# Allegro board STEPPER EVAL BRD - PCB Board File - Rev 1.0.brd
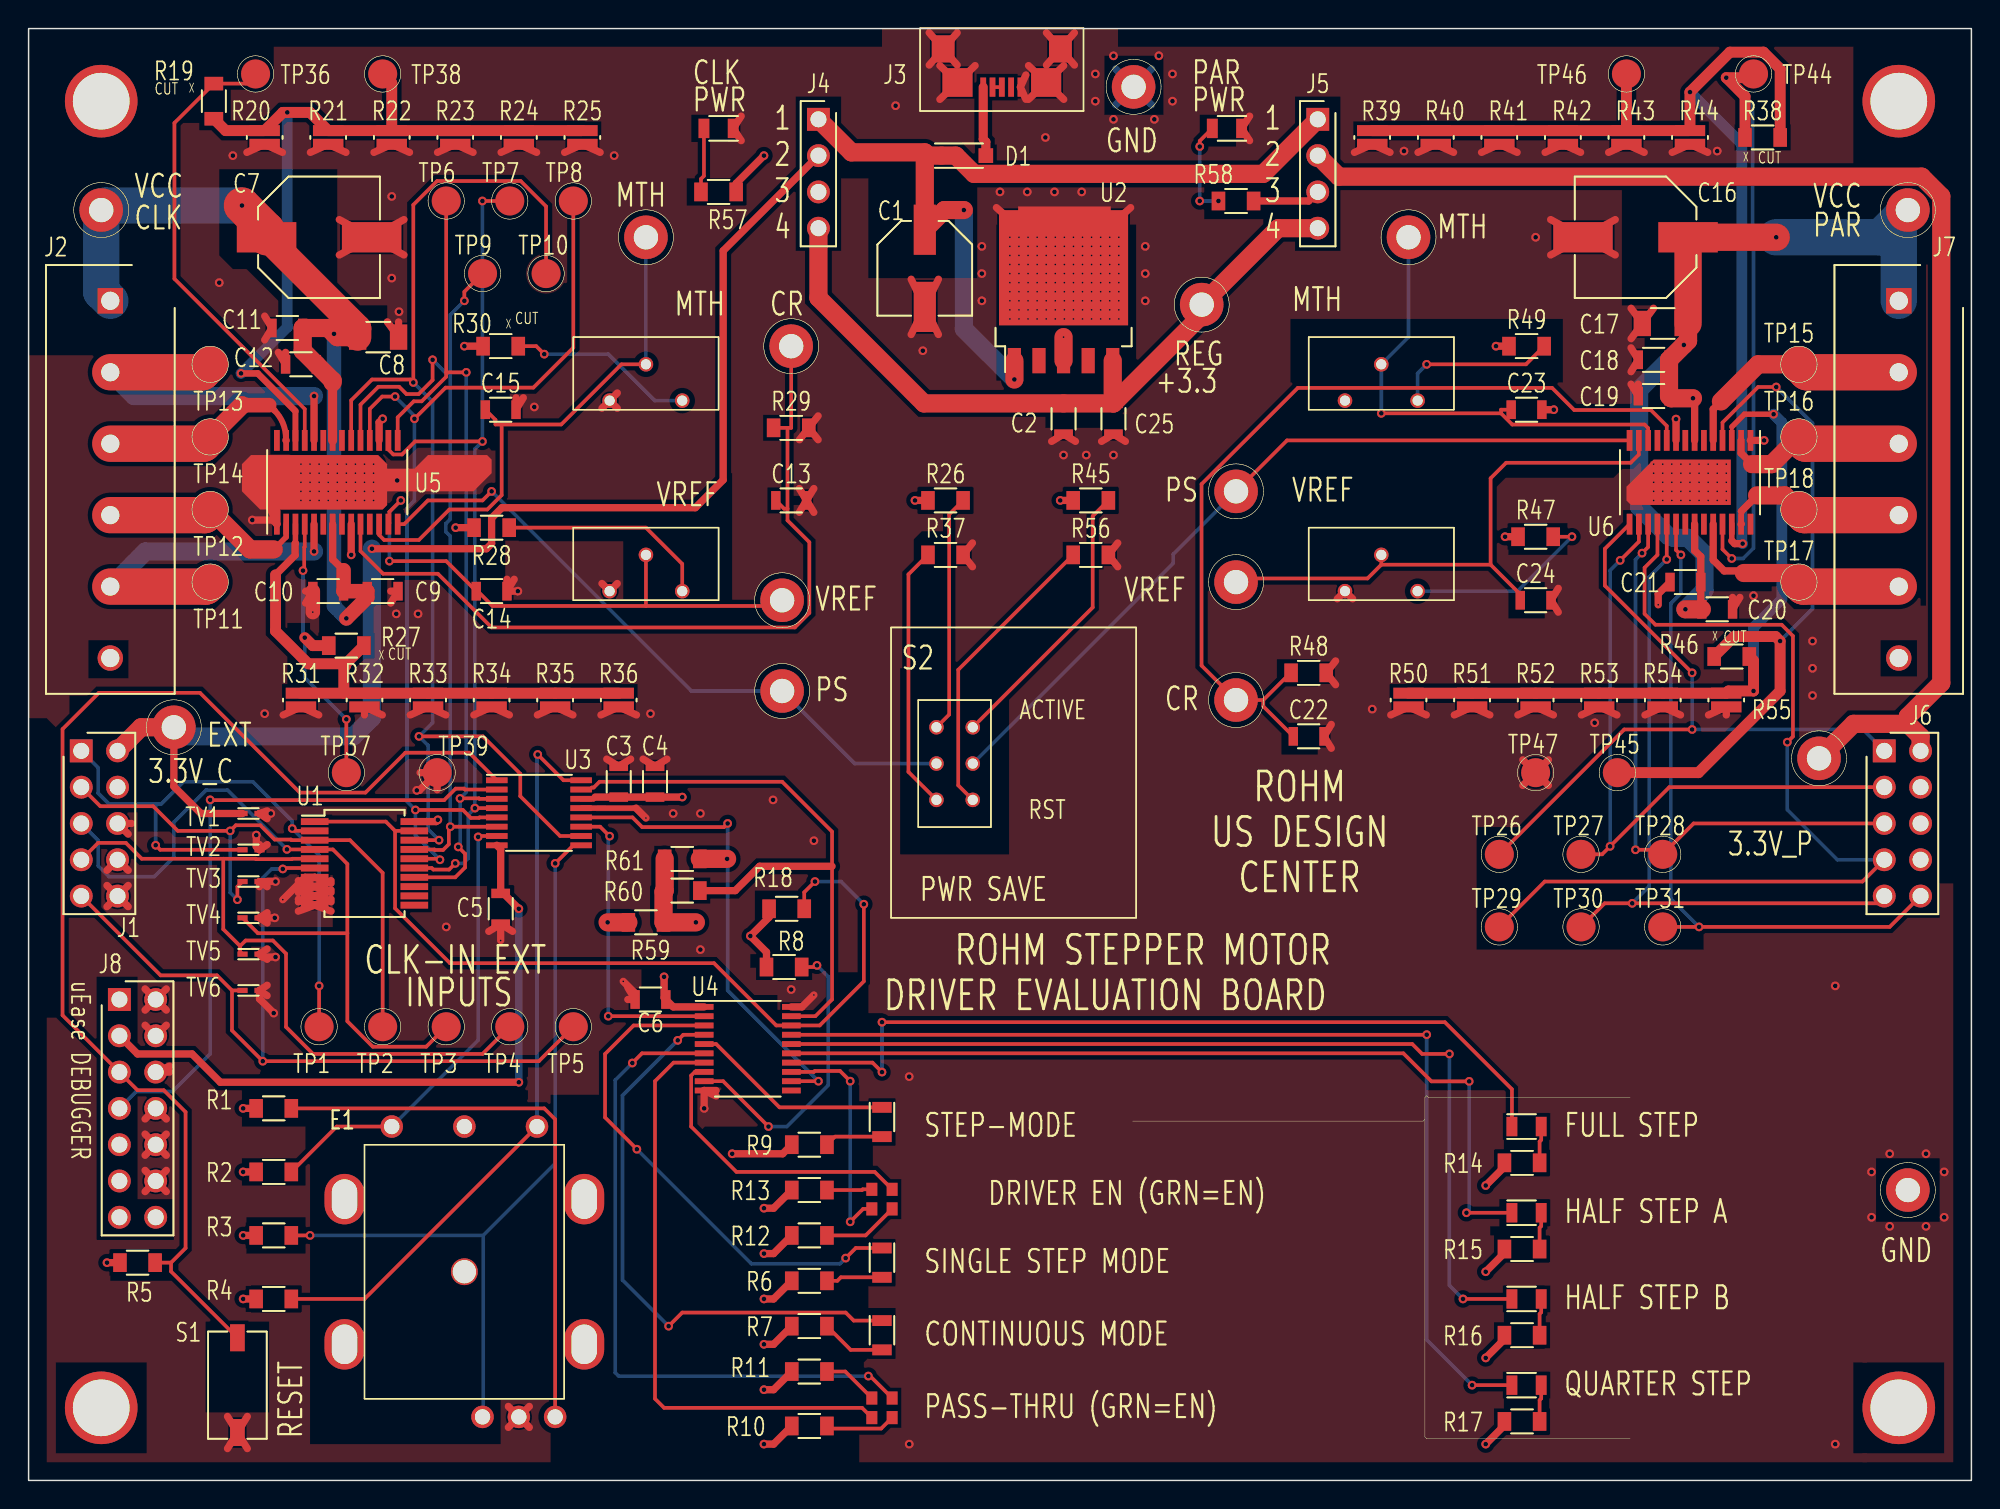
[diagram p0: board, top side]
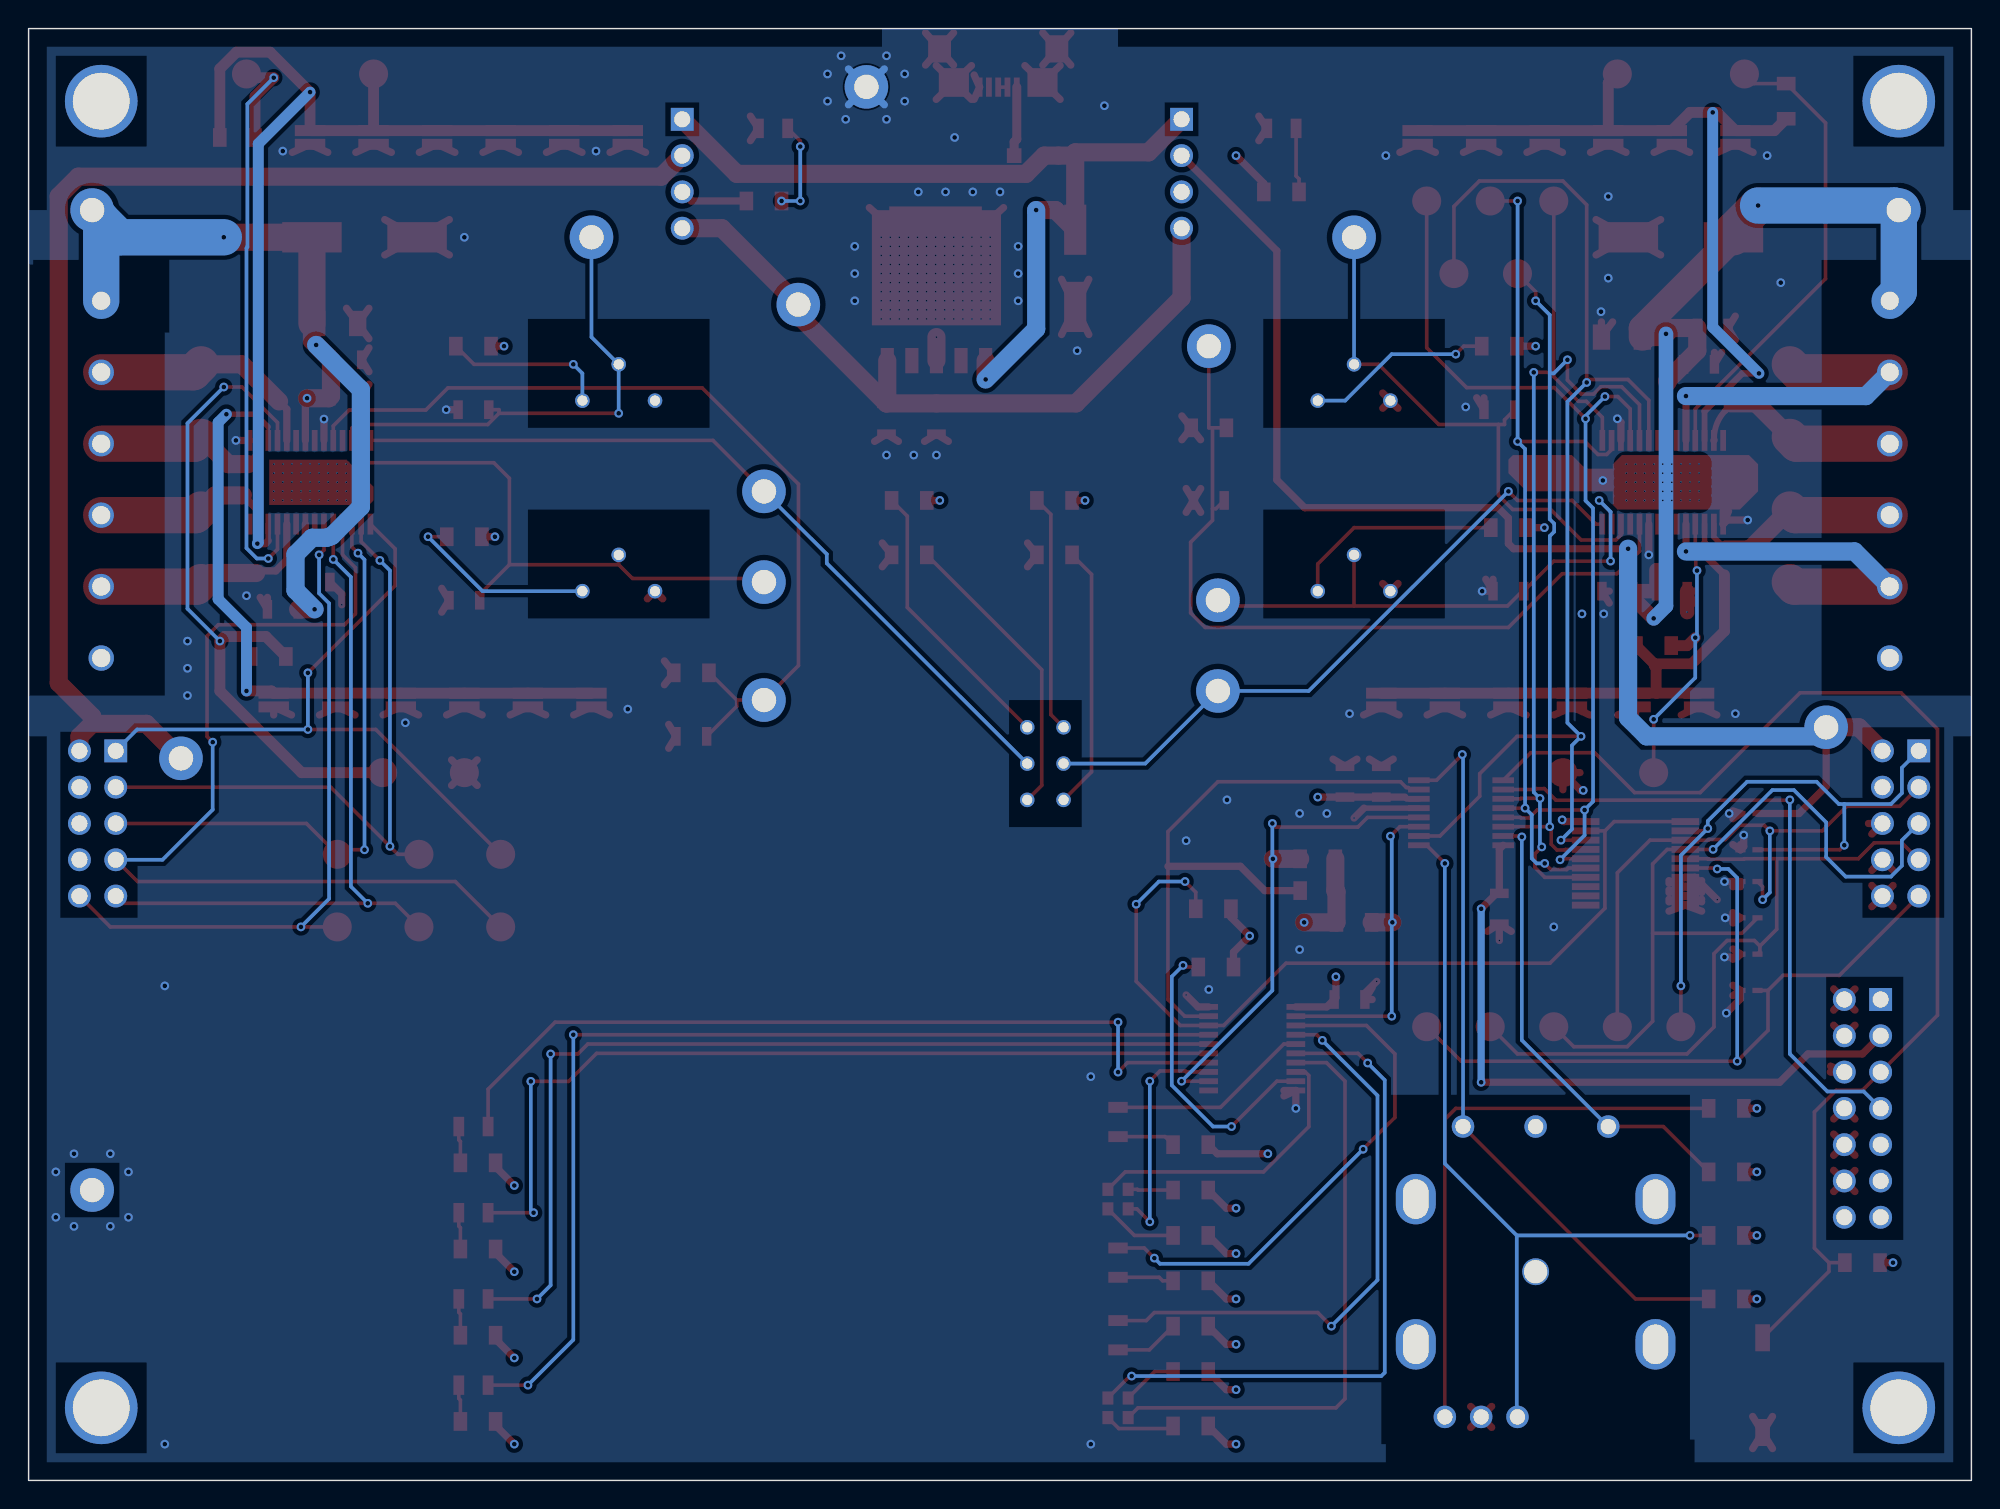
[diagram p1: board, bottom side, seen from below]

Outline 135.89 x 101.6 mm; copper layers: TOP, GND, PWR, BOTTOM. Coordinates in mm from the lower left corner of the outline.
Outline path: rectangle 0,0 135.89,101.6

## Design rules (mm)
nets with their own width: min track width 0.178; nets VPP
nets with their own width: min track width 0.254; nets OUT1A_C OUT1A_P OUT1B_C OUT1B_P OUT2A_C OUT2A_P OUT2B_C OUT2B_P REG_IN TST UE_RST VBUS VCC_C VCC_P
nets with their own width: min track width 0.508; nets +3.3V_C +3.3V_P EXT_+3.3V_C EXT_+3.3V_P GND_SIGNAL REG_+3.3V

## Placement (name value [footprint] x y rotation side)
C1  33uF, 50V  [CAPAE660X773N]  62.69 84.82 0 top
C2  0.1  [CAPC2012X145N]  72.39 74.3 90 top
C3  0.01  [CAPC2012X145N]  41.27 48.9 270 top
C4  4.7  [CAPC2012X145N]  43.81 48.9 270 top
C5  0.1  [CAPC2012X145N]  33.02 40.01 90 top
C6  0.01  [CAPC2012X145N]  43.5 33.66 0 top
C7  100uF, 50V  [CAPAE830X1050N]  20.32 87 90 top
C8  1.0  [CAPC3216X175N]  24.45 80.01 0 top
C9  0.1  [CAPC2012X145N]  24.77 62.23 0 top
C10  0.001  [CAPC2012X145N]  20.95 62.23 180 top
C11  0.1  [CAPC2012X145N]  18.1 80.64 180 top
C12  0.001  [CAPC2012X145N]  19.05 78.11 180 top
C13  0.001  [CAPC2012X145N]  53.34 68.58 0 top
C14  0.1  [CAPC2012X145N]  32.38 62.23 0 top
C15  0.1  [CAPC2012X145N]  33.02 74.93 0 top
C16  100uF, 50V  [CAPAE830X1050N]  112.39 87 270 top
C17  1.0  [CAPC3216X175N]  114.3 80.96 180 top
C18  0.1  [CAPC2012X145N]  113.67 78.42 180 top
C19  0.001  [CAPC2012X145N]  113.67 75.88 180 top
C20  0.1  [CAPC2012X145N]  118.11 60.96 0 top
C21  0.001  [CAPC2012X145N]  115.89 62.87 180 top
C22  0.001  [CAPC2012X145N]  89.53 52.07 0 top
C23  0.1  [CAPC2012X145N]  104.78 74.93 0 top
C24  0.1  [CAPC2012X145N]  105.41 61.59 0 top
C25  4.7  [CAPC2012X145N]  75.88 74.3 90 top
D1  20V 3A  [PMDU]  65.41 92.71 0 top
E1  62P22-L6  [62PENCODER]  30.48 14.61 0 top
J1  HDR 5X2  [HDR5X2]  3.68 51.05 270 top
J2  CLK-IN TERM BLOCK  [HDR6X1]  5.71 82.55 270 top
J3  Micro-B USB  [MICROUSBHIROSE]  68.07 100.18 180 top
J4  CLOCK-IN POWER SOURCE SELECTOR*  [HDR4X1]  55.24 95.25 270 top
J5  PARALLEL-IN POWER SOURCE SELECTOR*  [HDR4X1]  90.17 95.25 270 top
J6  HDR 5X2  [HDR5X2]  129.79 51.05 270 top
J7  PARALLEL TERM BLOCK  [HDR6X1]  130.81 82.55 270 top
J8  HDR 7X2  [HDR7X2]  6.35 33.66 270 top
LED1  LED  [DIOC2012X80N]  59.69 25.08 270 top
LED2  Bi-Color LED  [BILEDCC150X130X70N]  59.69 19.68 270 top
LED3  LED  [DIOC2012X80N]  59.69 15.24 270 top
LED4  LED  [DIOC2012X80N]  59.69 10.16 270 top
LED5  Bi-Color LED  [BILEDCC150X130X70N]  59.69 5.08 270 top
LED6  LED  [DIOC2012X80N]  104.78 24.77 0 top
LED7  LED  [DIOC2012X80N]  104.78 18.73 0 top
LED8  LED  [DIOC2012X80N]  104.78 12.7 0 top
LED9  LED  [DIOC2012X80N]  104.78 6.67 0 top
LED10  LED  [DIOC2012X80N]  48.26 94.61 180 top
LED11  LED  [DIOC2012X80N]  83.82 94.61 180 top
NOREF  -  [unnamed]  5.08 5.08 0 top
NOREF#2  -  [unnamed]  130.81 5.08 0 top
NOREF#3  -  [unnamed]  130.81 96.52 0 top
NOREF#4  -  [unnamed]  5.08 96.52 0 top
POT1  10K  [POTTHRUHOLE]  43.18 64.14 0 top
POT2  10K  [POTTHRUHOLE]  43.18 77.47 0 top
POT3  10K  [POTTHRUHOLE]  94.61 64.14 0 top
POT4  10K  [POTTHRUHOLE]  94.61 77.47 0 top
R1  91  [RESC2612X65N]  17.14 26.04 0 top
R2  10K  [RESC2612X65N]  17.14 21.59 0 top
R3  10K  [RESC2612X65N]  17.14 17.14 0 top
R4  10K  [RESC2612X65N]  17.14 12.7 0 top
R5  10K  [RESC2612X65N]  7.62 15.24 0 top
R6  1K  [RESC2612X65N]  54.61 13.97 180 top
R7  1K  [RESC2612X65N]  54.61 10.79 180 top
R8  10k  [RESC2612X65N]  52.84 35.93 0 top
R9  1K  [RESC2612X65N]  54.61 23.5 180 top
R10  1K  [RESC2612X65N]  54.61 3.81 180 top
R11  1K  [RESC2612X65N]  54.61 7.62 180 top
R12  1K  [RESC2612X65N]  54.61 17.14 180 top
R13  1K  [RESC2612X65N]  54.61 20.32 180 top
R14  1K  [RESC2612X65N]  104.46 22.23 180 top
R15  1K  [RESC2612X65N]  104.46 16.19 180 top
R16  1K  [RESC2612X65N]  104.46 10.16 180 top
R17  1K  [RESC2612X65N]  104.46 4.13 180 top
R18  10K  [RESC2612X65N]  53.02 40.01 0 top
R19  0  [RESC2612X65N]  12.95 96.52 270 top
R20  1.2  [RESC1220X65N]  16.51 93.98 0 top
R21  1.2  [RESC1220X65N]  20.95 93.98 0 top
R22  1.2  [RESC1220X65N]  25.4 93.98 0 top
R23  1.2  [RESC1220X65N]  29.84 93.98 0 top
R24  1.2  [RESC1220X65N]  34.29 93.98 0 top
R25  1.2  [RESC1220X65N]  38.73 93.98 0 top
R26  4.7K  [RESC2612X65N]  64.14 68.58 0 top
R27  0  [RESC2612X65N]  22.23 58.42 0 top
R28  1K  [RESC2612X65N]  32.38 66.67 0 top
R29  39K  [RESC2612X65N]  53.34 73.66 0 top
R30  3.48K  [RESC2612X65N]  33.02 79.38 0 top
R31  1.2  [RESC1220X65N]  19.05 54.61 0 top
R32  1.2  [RESC1220X65N]  23.5 54.61 0 top
R33  1.2  [RESC1220X65N]  27.94 54.61 0 top
R34  1.2  [RESC1220X65N]  32.38 54.61 0 top
R35  1.2  [RESC1220X65N]  36.83 54.61 0 top
R36  1.2  [RESC1220X65N]  41.27 54.61 0 top
R37  4.7K  [RESC2612X65N]  64.14 64.77 0 top
R38  0  [RESC2612X65N]  121.28 93.98 0 top
R39  1.2  [RESC1220X65N]  93.98 93.98 0 top
R40  1.2  [RESC1220X65N]  98.42 93.98 0 top
R41  1.2  [RESC1220X65N]  102.87 93.98 0 top
R42  1.2  [RESC1220X65N]  107.31 93.98 0 top
R43  1.2  [RESC1220X65N]  111.76 93.98 0 top
R44  1.2  [RESC1220X65N]  116.2 93.98 0 top
R45  4.7K  [RESC2612X65N]  74.3 68.58 0 top
R46  0  [RESC2612X65N]  119.13 57.66 0 top
R47  1K  [RESC2612X65N]  105.41 66.04 0 top
R48  39K  [RESC2612X65N]  89.53 56.52 0 top
R49  3.48K  [RESC2612X65N]  104.78 79.38 0 top
R50  1.2  [RESC1220X65N]  96.52 54.61 0 top
R51  1.2  [RESC1220X65N]  100.97 54.61 0 top
R52  1.2  [RESC1220X65N]  105.41 54.61 0 top
R53  1.2  [RESC1220X65N]  109.86 54.61 0 top
R54  1.2  [RESC1220X65N]  114.3 54.61 0 top
R55  1.2  [RESC1220X65N]  118.75 54.61 0 top
R56  4.7K  [RESC2612X65N]  74.3 64.77 0 top
R57  1K  [RESC2612X65N]  48.26 90.17 180 top
R58  1K  [RESC2612X65N]  84.45 89.53 180 top
R59  10K  [RESC2612X65N]  43.18 39.05 180 top
R60  10K  [RESC2612X65N]  45.72 41.27 0 top
R61  10K  [RESC2612X65N]  45.72 43.5 0 top
S1  Momentary Push-Button  [SWM7340X270N]  14.61 6.67 90 top
S2  DPDT  [SWTHRUHOLE]  64.77 50.16 270 top
TP1  Test Point R  [TPSMD80]  20.32 31.75 0 top
TP2  Test Point R  [TPSMD80]  24.77 31.75 0 top
TP3  Test Point R  [TPSMD80]  29.21 31.75 0 top
TP4  Test Point R  [TPSMD80]  33.66 31.75 0 top
TP5  Test Point R  [TPSMD80]  38.1 31.75 0 top
TP6  Test Point R  [TPSMD80]  29.21 89.53 0 top
TP7  Test Point R  [TPSMD80]  33.66 89.53 0 top
TP8  Test Point R  [TPSMD80]  38.1 89.53 0 top
TP9  Test Point R  [TPSMD80]  31.75 84.45 0 top
TP10  Test Point R  [TPSMD80]  36.2 84.45 0 top
TP11  Test Point R  [TPSMD80]  12.7 62.87 0 top
TP12  Test Point R  [TPSMD80]  12.7 67.94 0 top
TP13  Test Point R  [TPSMD80]  12.7 78.11 0 top
TP14  Test Point R  [TPSMD80]  12.7 73.03 0 top
TP15  Test Point R  [TPSMD80]  123.83 78.11 0 top
TP16  Test Point R  [TPSMD80]  123.83 73.03 0 top
TP17  Test Point R  [TPSMD80]  123.83 62.87 0 top
TP18  Test Point R  [TPSMD80]  123.83 67.94 0 top
TP19  Test Point R  [TPTH120X67]  82.05 82.28 0 top
TP20  Test Point R  [TPTH120X67]  10.16 52.7 0 top
TP21  Test Point R  [TPTH120X67]  125.23 50.53 0 top
TP22  Test Point R  [TPTH120X67]  5.08 88.9 0 top
TP23  Test Point R  [TPTH120X67]  131.44 88.9 0 top
TP24  Test Point R  [TPTH120X67]  77.29 97.52 0 top
TP25  Test Point R  [TPTH120X67]  131.44 20.32 0 top
TP26  Test Point R  [TPSMD80]  102.87 43.81 0 top
TP27  Test Point R  [TPSMD80]  108.58 43.81 0 top
TP28  Test Point R  [TPSMD80]  114.3 43.81 0 top
TP29  Test Point R  [TPSMD80]  102.87 38.73 0 top
TP30  Test Point R  [TPSMD80]  108.58 38.73 0 top
TP31  Test Point R  [TPSMD80]  114.3 38.73 0 top
TP32  Test Point R  [TPTH120X67]  52.7 55.24 0 top
TP33  Test Point R  [TPTH120X67]  52.7 61.59 0 top
TP34  Test Point R  [TPTH120X67]  53.34 79.38 0 top
TP35  Test Point R  [TPTH120X67]  43.18 87 0 top
TP36  Test Point R  [TPSMD80]  15.88 98.42 0 top
TP37  Test Point R  [TPSMD80]  22.23 49.53 0 top
TP38  Test Point R  [TPSMD80]  24.77 98.42 0 top
TP39  Test Point R  [TPSMD80]  28.57 49.53 0 top
TP40  Test Point R  [TPTH120X67]  84.45 69.22 0 top
TP41  Test Point R  [TPTH120X67]  84.45 62.87 0 top
TP42  Test Point R  [TPTH120X67]  84.45 54.61 0 top
TP43  Test Point R  [TPTH120X67]  96.52 87 0 top
TP44  Test Point R  [TPSMD80]  120.65 98.42 0 top
TP45  Test Point R  [TPSMD80]  111.12 49.53 0 top
TP46  Test Point R  [TPSMD80]  111.76 98.42 0 top
TP47  Test Point R  [TPSMD80]  105.41 49.53 0 top
TV1  5.78V 100mW  [ESDFL1406X55N]  15.56 46.67 0 top
TV2  5.78V 100mW  [ESDFL1406X55N]  15.56 44.13 0 top
TV3  5.78V 100mW  [ESDFL1406X55N]  15.56 41.91 0 top
TV4  5.78V 100mW  [ESDFL1406X55N]  15.56 39.37 0 top
TV5  5.78V 100mW  [ESDFL1406X55N]  15.56 36.83 0 top
TV6  5.78V 100mW  [ESDFL1406X55N]  15.56 34.29 0 top
U1  74LVC541A  [SOP65P780X200-20N]  23.5 43.18 270 top
U2  BD3570HFP  [TO172P1054X200-6N]  72.39 83.19 0 top
U3  ML610Q102  [SOP65P640X125-16N]  35.7 46.72 270 top
U4  BD8377FV-M  [SOP65P640X125-20N]  50.3 30.21 270 top
U5  BD63877EFV  [SOP65P640X100-29N]  21.59 69.85 0 top
U6  BD63876EFV  [SOP65P640X100-29N]  116.2 69.85 180 top

## Library data of the parts
C1 = C-POL_0: room: Voltage Reg
C2 = C_2: room: Voltage Reg
C3-C5 C25 = C_2: room: Micro
C6 = C_2
C7 = C-POL_0: room: Clock-In
C8-C15 = C_2: room: Clock-In
C16 = C-POL_0: room: Parallel
C17-C24 = C_2: room: Parallel
D1 = DIODE SCHOTTKY 20V 3A 123-SOD_3: room: Voltage Reg
E1 = ROTARY_ENCODER_QUAD_OUTPUT_0: room: Micro
J1 = HDR 5x2_0.100": room: 2
J2 J7 = CONN_TERM_BLOCK_6X1_0: room: 4
J3 = CONN PCB 5_0: room: Voltage Reg
J4 J5 = 4-PIN Jumper_0: room: Voltage Reg
J6 = HDR 5x2_1.100": room: 3
J8 = HDR 7x2_0.100": room: Micro
LED1 LED3 LED4 LED6-LED11 = LED_1
LED2 LED5 = Bi-Color LED-2_0
POT1 POT2 = POT_10K_10%_0: room: Clock-In
POT3 POT4 = POT_10K_10%_0: room: Parallel
R1 = RES_91_5%_1/8W_1: room: Micro
R2-R5 = RES_10K_1%_1/8W_0805PKG: room: Micro
R6 R7 R9-R17 R57 R58 = RES_1K_1%_1/8W_0805PKG
R8 = RES 150 OHM 1/8W 1% 0805 SMD
R18 R59-R61 = RES_10K_1%_1/8W_0805PKG
R19 R27 = RES_0_1/10W_0603PKG: room: Clock-In
R20-R25 R31-R36 = RES_1.2_1%_1/2W_0805WIDE_PKG: room: Clock-In
R26 R37 = RES 4.7K OHM 1/10W 1% 0805 SMD: room: Clock-In
R28 = RES_11.5K_5%_1/8W_0805PKG: room: Clock-In
R29 = RES_39K_1%_1/8W_0805PKG: room: Clock-In
R30 = RES_3.48K_1%_1/8W_0805PKG: room: Clock-In
R38 R46 = RES_0_1/10W_0603PKG: room: Parallel
R39-R44 R50-R55 = RES_1.2_1%_1/2W_0805WIDE_PKG: room: Parallel
R45 R56 = RES 4.7K OHM 1/10W 1% 0805 SMD: room: Parallel
R47 = RES_11.5K_5%_1/8W_0805PKG: room: Parallel
R48 = RES_39K_1%_1/8W_0805PKG: room: Parallel
R49 = RES_3.48K_1%_1/8W_0805PKG: room: Parallel
S1 = SW PUSHBUTTON_0: room: Micro
S2 = DPDT Switch-6-pin_0: room: joint
TP1-TP5 = Test Point R: room: 2
TP6-TP10 = Test Point R
TP11-TP18 = Test Point R: room: 4
TP19-TP25 = Test Point R: room: 5
TP26-TP31 = Test Point R: room: 3
TP32-TP39 = Test Point R: room: Clock-In
TP40-TP47 = Test Point R: room: Parallel
TV1-TV6 = DIODE ESD 5V 100mW BiDir VMN2_3: room: 2
U1 = SN74LVC541A_5: room: 2
U2 = BD3570HFP_2: room: Voltage Reg
U3 = ML610Q102: room: Micro
U4 = BD8377FV-M_2
U5 = BD63877EFV_5: room: Clock-In
U6 = BD63876EFV_2: room: Parallel

## Footprints (pads in the part's own frame, mm; a bottom-side part is the same pattern mirrored in y, then rotated)
62PENCODER
  round 1.88 hole 1.626 unplated: (0,0)
  round 1.575 hole 1.067: 1(6.35,-10.16) 2(3.81,-10.16) 3(1.27,-10.16) 4(5.08,10.16) 5(0,10.16) 6(-5.08,10.16)
  oval 2.794x3.531 hole 1.778x2.769: 8(8.382,5.08) 9(8.382,-5.08) 10(-8.382,-5.08) 11(-8.382,5.08)
BILEDCC150X130X70N
  rect 0.92x0.77 smd: 1(-0.685,-0.71) 2(0.685,-0.71) 3(0.685,0.71) 4(-0.685,0.71)
CAPAE660X773N
  rect 1.55x3.51 smd: 1(0,2.7) 2(0,-2.7)
CAPAE830X1050N
  rect 2.12x4.16 smd: 1(0,3.675) 2(0,-3.675)
CAPC2012X145N
  rect 0.66x1.31 smd: 1(-1.075,0) 2(1.075,0)
CAPC3216X175N
  rect 1.21x1.77 smd: 1(-1.43,0) 2(1.43,0)
DIOC2012X80N
  rect 0.76x1.36 smd: A(1.025,0) C(-1.025,0)
ESDFL1406X55N
  rect 0.71x0.37 smd: A(0.595,0) C(-0.595,0)
HDR4X1
  rect 1.6x1.6 hole 1.118: 1(0,0)
  round 1.6 hole 1.118: 2(2.54,0) 3(5.08,0) 4(7.62,0)
HDR5X2
  rect 1.6x1.6 hole 1.118: 1(0,0)
  round 1.6 hole 1.118: 2(0,2.54) 3(2.54,0) 4(2.54,2.54) 5(5.08,0) 6(5.08,2.54) 7(7.62,0) 8(7.62,2.54) 9(10.16,0) 10(10.16,2.54)
HDR6X1
  rect 1.778x1.778 hole 1.27: 1(0,0)
  round 1.778 hole 1.27: 2(5,0) 3(10,0) 4(15,0) 5(20,0) 6(25,0)
HDR7X2
  rect 1.6x1.6 hole 1.118: 1(0,0)
  round 1.6 hole 1.118: 2(0,2.54) 3(2.54,0) 4(2.54,2.54) 5(5.08,0) 6(5.08,2.54) 7(7.62,0) 8(7.62,2.54) 9(10.16,0) 10(10.16,2.54) 11(12.7,0) 12(12.7,2.54) 13(15.24,0) 14(15.24,2.54)
MICROUSBHIROSE
  rect 0.406x1.346 smd: 1(1.3,2.675) 2(0.65,2.675) 3(0,2.675) 4(-0.65,2.675) 5(-1.3,2.675)
  rect 2.108x2.007 smd: 6(-3.1,2.35) 7(3.1,2.35)
  rect 1.6x1.905 smd: 8(-4.1,0) 9(4.1,0)
PMDU
  rect 1.02x1.03 smd: A(1.55,0) C(-1.55,0)
POTTHRUHOLE
  round 1.016 hole 0.711: 1(2.54,-1.905) 2(0,0.635) 3(-2.54,-1.905)
RESC1220X65N
  rect 2.13x0.77 smd: 1(0,0.48) 2(0,-0.48)
RESC2612X65N
  rect 0.95x1.31 smd: 1(-1.23,0) 2(1.23,0)
SOP65P640X100-29N
  rect 0.4x1.46 smd: 1(-4.225,-2.93) 2(-3.575,-2.93) 3(-2.925,-2.93) 4(-2.275,-2.93) 5(-1.625,-2.93) 6(-0.975,-2.93) 7(-0.325,-2.93) 8(0.325,-2.93) 9(0.975,-2.93) 10(1.625,-2.93) 11(2.275,-2.93) 12(2.925,-2.93) 13(3.575,-2.93) 14(4.225,-2.93) 15(4.225,2.93) 16(3.575,2.93) 17(2.925,2.93) 18(2.275,2.93) 19(1.625,2.93) 20(0.975,2.93) 21(0.325,2.93) 22(-0.325,2.93) 23(-0.975,2.93) 24(-1.625,2.93) 25(-2.275,2.93) 26(-2.925,2.93) 27(-3.575,2.93) 28(-4.225,2.93)
  rect 5.5x2.9 smd: 29(0,0)
SOP65P640X125-16N
  rect 0.41x1.51 smd: 1(-2.275,-2.95) 2(-1.625,-2.95) 3(-0.975,-2.95) 4(-0.325,-2.95) 5(0.325,-2.95) 6(0.975,-2.95) 7(1.625,-2.95) 8(2.275,-2.95) 9(2.275,2.95) 10(1.625,2.95) 11(0.975,2.95) 12(0.325,2.95) 13(-0.325,2.95) 14(-0.975,2.95) 15(-1.625,2.95) 16(-2.275,2.95)
SOP65P640X125-20N
  rect 0.41x1.31 smd: 1(-2.925,-3.05) 2(-2.275,-3.05) 3(-1.625,-3.05) 4(-0.975,-3.05) 5(-0.325,-3.05) 6(0.325,-3.05) 7(0.975,-3.05) 8(1.625,-3.05) 9(2.275,-3.05) 10(2.925,-3.05) 11(2.925,3.05) 12(2.275,3.05) 13(1.625,3.05) 14(0.975,3.05) 15(0.325,3.05) 16(-0.325,3.05) 17(-0.975,3.05) 18(-1.625,3.05) 19(-2.275,3.05) 20(-2.925,3.05)
SOP65P780X200-20N
  rect 0.48x1.93 smd: 1(-2.925,-3.485) 2(-2.275,-3.485) 3(-1.625,-3.485) 4(-0.975,-3.485) 5(-0.325,-3.485) 6(0.325,-3.485) 7(0.975,-3.485) 8(1.625,-3.485) 9(2.275,-3.485) 10(2.925,-3.485) 11(2.925,3.485) 12(2.275,3.485) 13(1.625,3.485) 14(0.975,3.485) 15(0.325,3.485) 16(-0.325,3.485) 17(-0.975,3.485) 18(-1.625,3.485) 19(-2.275,3.485) 20(-2.925,3.485)
SWM7340X270N
  rect 1.89x1.03 smd: 1(-3.315,0) 2(3.315,0)
SWTHRUHOLE
  round 1.016 hole 0.711: 1(-2.54,-1.27) 2(0,-1.27) 3(2.54,-1.27) 4(2.54,1.27) 5(0,1.27) 6(-2.54,1.27)
TO172P1054X200-6N
  rect 0.92x1.77 smd: 1(-3.44,-4.822) 2(-1.72,-4.822) 3(0,-4.822) 4(1.72,-4.822) 5(3.44,-4.822)
  rect 9.03x8.06 smd: 6(0,1.677)
TPSMD80
  round 2.032 smd: 1(0,0)
TPTH120X67
  round 3.048 hole 1.702: 1(0,0)
unnamed
  round 5.08 hole 3.962 unplated: (0,0)

## Nets
+3.3V_C: C3.2 C4.2 C6.2 J4.3 R1.1 R2.1 R3.1 R4.1 R5.1 R6.2 R7.2 R8.1 R9.2 R10.2 R11.2 R12.2 R13.2 R14.2 R15.2 R16.2 R17.2 R18.1 R26.1 R28.1 R30.1 R57.1 R59.1 R60.1 R61.1 U1.20(VCC) U3.14(VDD) U4.1(VCC)
+3.3V_P: J5.3 R45.1 R47.1 R49.1 R58.1
GND_SIGNAL: C1.2 C2.1 C3.1 C4.1 C5.1 C6.1 C7.2 C8.2 C9.2 C10.2 C11.2 C12.2 C13.2 C14.2 C15.2 C16.2 C17.2 C18.2 C19.2 C20.2 C21.2 C22.2 C23.2 C24.2 C25.1 E1.2(GND) E1.5(SW A) J1.4(2) J1.6(3) J1.8(4) J1.10(5) J2.6 J3.5 J3.6 J3.7 J3.8 J3.9 J6.4(2) J6.6(3) J6.8(4) J7.6 J8.2(1) J8.4(2) J8.6(3) J8.8(4) J8.10(5) J8.12 LED10.C(CATHODE) LED11.C(CATHODE) POT1.3 POT2.3 POT3.3 POT4.3 R20.2 R21.2 R22.2 R23.2 R24.2 R25.2 R29.2 R31.2 R32.2 R33.2 R34.2 R35.2 R36.2 R37.2 R39.2 R40.2 R41.2 R42.2 R43.2 R44.2 R48.2 R50.2 R51.2 R52.2 R53.2 R54.2 R55.2 R56.2 S1.1 TP24.1(TP) TP25.1(TP) TP39.1(TP) TP47.1(TP) TV1.A(ANODE) TV2.A(ANODE) TV3.A(ANODE) TV4.A(ANODE) TV5.A(ANODE) TV6.A(ANODE) U1.7(A5) U1.8(A6) U1.9(A7) U1.10(GND) U2.3(GND) U2.6(FIN) U3.13(GND) U4.10(OEN_B) U4.20(GND) U5.1(GND#1) U5.9(GND#9) U5.17(TEST) U6.1(GND#1) U6.9(GND#9)
VBUS: D1.A(ANODE) J3.1
VCC_C: C7.1 C8.1 C9.1 C10.1 C11.1 C12.1 J2.1 TP22.1(TP) U5.7(VCC#7) U5.22(VCC#22)
VCC_P: C16.1 C17.1 C18.1 C19.1 C20.1 C21.1 J7.1 TP23.1(TP) U6.7(VCC#7) U6.22(VCC#22)
BUFFER_OE: R18.2 U1.1(O\E\1) U1.19(O\E\2) U4.18(D11)
CLK: TP6.1(TP) U1.14(Y4) U3.3(B0) U5.15(CLK)
CLK_E: J1.9(10) TP5.1(TP) TV6.C(CATHODE) U1.6(A4)
CW_CCW: TP7.1(TP) U1.15(Y3) U3.4(B1) U5.16(CW_CCW)
CW_CCW_E: J1.7(9) TP4.1(TP) TV5.C(CATHODE) U1.5(A3)
D+: J3.2 J3.3
ENABLE: TP10.1(TP) U1.18(Y0) U3.10(B4) U5.20(ENABLE)
ENABLE_E: J1.1(6) TP1.1(TP) TV2.C(CATHODE) U1.2(A0)
EXT_+3.3V_C: J1.2(1) J4.2 TP20.1(TP) TV1.C(CATHODE)
EXT_+3.3V_P: J5.2 J6.2(1) TP21.1(TP)
I01: J6.3(7) TP27.1(TP) U6.16(I01)
I02: J6.9(10) TP30.1(TP) U6.19(I02)
I11: J6.5(8) TP28.1(TP) U6.17(I11)
I12: J6.10(5) TP31.1(TP) U6.20(I12)
LED_CLK: R60.2 U3.15(B7) U4.19(CLK)
LED_LATCH: R61.2 U3.12(B6) U4.12(LATCH)
LED_SERIN: R59.2 U3.11(B5) U4.2(SERIN)
MODE_0: TP8.1(TP) U1.16(Y2) U3.5(B2) U5.18(MODE_0)
MODE_0_E: J1.5(8) TP3.1(TP) TV4.C(CATHODE) U1.4(A2)
MODE_1: TP9.1(TP) U1.17(Y1) U3.6(B3) U5.19(MODE_1)
MODE_1_E: J1.3(7) TP2.1(TP) TV3.C(CATHODE) U1.3(A1)
OUT1A_C: J2.5 TP11.1(TP) U5.5(OUT1A)
OUT1A_P: J7.2 TP15.1(TP) U6.5(OUT1A)
OUT1B_C: J2.4 TP12.1(TP) U5.2(OUT1B)
OUT1B_P: J7.3 TP16.1(TP) U6.2(OUT1B)
OUT2A_C: J2.2 TP13.1(TP) U5.24(OUT2A)
OUT2A_P: J7.5 TP17.1(TP) U6.24(OUT2A)
OUT2B_C: J2.3 TP14.1(TP) U5.27(OUT2B)
OUT2B_P: J7.4 TP18.1(TP) U6.27(OUT2B)
PHASE 1: J6.1(6) TP26.1(TP) U6.15(PHASE1)
PHASE 2: J6.7(9) TP29.1(TP) U6.18(PHASE2)
REG_+3.3V: C2.2 C25.2 J4.4 J5.4 TP19.1(TP) U2.5(VOUT)
REG_IN: C1.1 D1.C(CATHODE) J4.1 J5.1 U2.1(VIN)
TST: J8.7(9) U3.2(TEST)
UE_RST: J8.5(8) R5.2 S1.2 U3.1(RESET)
VPP: C5.2 J8.3(7) U3.8(VPP)
N04356: R38.2 R39.1 R40.1 R41.1 R42.1 R43.1 R44.1 TP46.1(TP) U6.26(RNF2)
N04438: R46.2 R50.1 R51.1 R52.1 R53.1 R54.1 R55.1 U6.3(RNF1)
N05207: R38.1 TP44.1(TP) U6.25(RNF2S)
N05211: R46.1 TP45.1(TP) U6.4(RNF1S)
N07764: C22.1 R48.1 TP42.1(TP) U6.10(CR)
N07926: C23.1 POT4.2 TP43.1(TP) U6.12(MTH)
N07967: C24.1 POT3.2 TP41.1(TP) U6.13(VREF)
N07979: S2.5(CENTER) TP40.1(TP) U6.14(PS)
N08045: R45.2 S2.6(ON)
N08052: R56.1 S2.4(OFF)
N13007: R19.2 R20.1 R21.1 R22.1 R23.1 R24.1 R25.1 TP38.1(TP) U5.26(RNF2)
N13055: R27.2 R31.1 R32.1 R33.1 R34.1 R35.1 R36.1 U5.3(RNF1)
N13235: R19.1 TP36.1(TP) U5.25(RNF2S)
N13239: R27.1 TP37.1(TP) U5.4(RNF1S)
N13369: E1.4(OUTPUT A) R4.2 U3.16(A0)
N13541: C13.1 R29.1 TP34.1(TP) U5.10(CR)
N13553: C15.1 POT2.2 TP35.1(TP) U5.12(MTH)
N13573: C14.1 POT1.2 TP33.1(TP) U5.13(VREF)
N13585: S2.2(CENTER) TP32.1(TP) U5.14(PS)
N13636: E1.3(OUTPUT B) R3.2 U3.9(A1)
N13645: R37.1 S2.3(OFF)
N18632: E1.6(SW B) R2.2 U3.7(A2)
N24750: LED3.A(ANODE) R6.1
N24893: LED4.A(ANODE) R7.1
N25089: LED1.A(ANODE) R9.1
N25117: LED5.3(ANODE-2) R10.1
N25418: LED6.A(ANODE) R14.1
N25588: LED7.A(ANODE) R15.1
N25650: LED3.C(CATHODE) U4.3(D0)
N25662: LED4.C(CATHODE) U4.4(D1)
N25674: LED1.C(CATHODE) U4.5(D2)
N25686: LED5.4(CATHODE-2) U4.6(D3)
N25698: LED5.2(CATHODE-1) U4.7(D4)
N25710: LED2.4(CATHODE-2) U4.8(D5)
N25722: LED2.2(CATHODE-1) U4.13(D6)
N25734: LED6.C(CATHODE) U4.14(D7)
N25746: LED7.C(CATHODE) U4.15(D8)
N25832: LED8.A(ANODE) R16.1
N25874: LED9.A(ANODE) R17.1
N25916: LED8.C(CATHODE) U4.16(D9)
N25920: LED9.C(CATHODE) U4.17(D10)
N39738: R26.2 S2.1(ON)
N64475: R8.2 U4.9(RST_B)
N72290: POT3.1 R47.2
N72302: POT4.1 R49.2
N72314: POT2.1 R30.2
N72342: POT1.1 R28.2
N81433: E1.1(5V) R1.2
N100226: LED2.3(ANODE-2) R12.1
N100233: LED2.1(ANODE-1) R13.1
N100254: LED5.1(ANODE-1) R11.1
N158063: LED10.A(ANODE) R57.2
N159401: LED11.A(ANODE) R58.2

Pads without a net: E1 8 9 10 11; J3 4; J8 1 9 11 13 14; U1 11 12 13; U2 2 4; U4 11; U5 6 8 11 21 23 28 29; U6 6 8 11 21 23 28 29

## Via types
v1: diameter 0.61, hole 0.33, TOP to BOTTOM, 211 vias
v2: diameter 0.127, hole 0.254, TOP to BOTTOM, 228 vias

## Routing (per net, layer and track width the routed paths; a pad name or vN(x,y) marks a point on that pad's centre or on a via; arc(x,y) is an arc through that point)
+3.3V_C: length 64.3
  TOP w0.381: 39.63,47.82 39.51,47.7 U3.14
  TOP w0.508: v1(51.44,15.88) 52.11,15.88 R12.2 ; v1(101.92,2.54) 103.23,3.85 R17.2 ; R10.2 52.11,2.54 v1(51.44,2.54) ; R28.1 v1(29.87,66.67) ; R16.2 103.23,9.88 v1(101.92,8.57) ; R15.2 103.23,15.91 v1(101.92,14.61) ; v1(45.72,47.82) C4.2 C3.2 39.63,47.82 ; v1(51.44,12.7) 52.11,12.7 R6.2 ; R11.2 52.11,6.35 v1(51.44,6.35) ; v1(28.63,46.23) 28.5,46.11 U1.20 ; R26.1 v1(62,68.58) ; R13.2 52.11,19.05 v1(51.44,19.05) ; R8.1 51.61,36.97 v1(50.48,38.1) 51.79,39.41 R18.1 ; U4.1 45.09,33.14 C6.2 44.45,33.78 v1(44.45,35.24) ; R7.2 52.11,9.53 v1(51.44,9.53) ; v1(49.21,22.86) 52.74,22.86 R9.2 ; R4.1 v1(15.01,12.7) ; R3.1 v1(15.01,17.14) ; R57.1 49.49,90.77 v1(51.44,92.71) ; v1(15.01,21.59) R2.1 ; R14.2 103.23,21.95 v1(101.92,20.64) ; v1(15.01,26.04) R1.1 ; R30.1 v1(30.48,79.38) ; R5.1 v1(5.48,15.24)
  TOP w1.27: v1(46.67,39.05) R59.1 44.41,41.2 R60.1 R61.1
+3.3V_P: length 7.5
  TOP w0.508: J5.3 89.53,89.53 R58.1 ; R47.1 v1(103.27,66.04) ; R45.1 v1(72.16,68.58) ; R49.1 v1(102.64,79.38)
GND_SIGNAL: length 308.3
  TOP w0.381: U3.13 42.49,47.05
  TOP w0.508: 97.76,53.57 R50.2 95.28,53.57 ; 114.96,92.94 R44.2 117.45,92.94 ; 33.56,3.71 E1.2 ; E1.2 33.56,5.18 ; E1.2 35.02,3.71 ; E1.2 35.02,5.18 ; 113,92.94 R43.2 110.52,92.94 ; 8.15,20.21 J8.12 ; J8.12 9.63,20.21 ; J8.12 9.63,21.7 ; J8.12 8.15,21.7 ; 28.57,48.34 TP39.1 ; TP39.1 27.33,48.29 v1(27.15,48.29) ; TP39.1 27.38,49.53 ; 19.37,61.4 C10.2 19.37,62.23 ; 71.56,72.71 C2.1 73.22,72.71 ; 13.91,4.48 S1.1 ; S1.1 15.3,2.23 ; S1.1 15.3,4.48 ; S1.1 13.91,2.23 ; 104.11,92.94 R41.2 101.63,92.94 ; 42.11,50.48 C3.1 40.44,50.48 ; TV6.A 16.69,33.93 ; TV6.A 16.69,34.65 ; TV6.A 16.15,33.69 v1(17.14,32.7) ; 106.99,62.43 C24.2 106.99,60.76 ; U1.8 21.15,41.14 ; U1.8 18.87,41.97 ; U1.8 21.15,41.97 ; U1.8 18.87,41.14 ; C1.2 63.64,84.06 ; C1.2 61.73,80.19 ; C1.2 61.73,84.06 ; C1.2 63.64,80.19 ; 42.49,47.05 v2(43.18,46.35) ; 91.54,61.69 92.08,62.23 92.61,61.69 ; 29.18,53.57 R33.2 26.7,53.57 ; C21.2 113.98,62.03 v2(113.98,61.28) ; 32.19,38.42 C5.1 ; C5.1 33.85,38.42 ; C5.1 v2(33.02,37.78) ; U1.10 21.15,40.67 ; U1.10 18.87,39.84 ; U1.10 18.87,40.67 ; U1.10 21.15,39.84 ; U1.9 21.15,41.32 ; U1.9 21.15,40.49 ; U1.9 18.87,40.49 ; U1.9 18.87,41.32 ; TP47.1 106.31,48.63 ; TP47.1 104.51,50.43 ; TP47.1 104.51,48.63 ; TP47.1 106.31,50.43 ; 63.74,96.65 J3.7 ; J3.7 66.2,99.01 ; J3.7 63.74,99.01 ; U5.17 24.52,74.05 v1(24.77,74.3) ; 35.59,53.57 R35.2 38.07,53.57 ; 6.97,42.69 J1.8 5.48,42.69 ; 8.15,34.4 J8.2 ; J8.2 9.63,34.4 ; J8.2 8.15,32.91 ; J8.2 9.63,32.91 ; 17.81,53.57 R31.2 20.29,53.57 ; 106.65,53.57 R52.2 104.17,53.57 ; 67.7,89.07 U2.6 77.08,89.07 ; 41.18,62.77 POT1.3 40.1,62.77 ; 31.09,92.94 R23.2 28.6,92.94 ; 22.2,92.94 R21.2 19.71,92.94 ; 119.18,61.79 C20.2 119.69,61.79 ; 85.4,95.47 LED11.C 85.4,93.76 ; POT2.3 41.18,75.03 ; POT2.3 40.1,75.03 ; POT2.3 41.18,76.1 ; 106.07,92.94 R42.2 108.56,92.94 ; v1(15.65,67.21) 17.08,67.21 U5.1 ; J3.8 73.15,101.31 ; J3.8 73.15,99.05 ; J3.8 71.19,99.05 ; J3.8 71.19,101.31 ; R29.2 55.22,74.49 ; R29.2 53.92,72.83 ; R29.2 55.22,72.83 ; 17.75,92.94 R20.2 15.27,92.94 ; 9.85,28.99 J8.6 9.87,28.57 ; 99.72,53.57 R51.2 102.21,53.57 ; 21.74,85.76 C7.2 ; C7.2 26.25,88.23 ; C7.2 26.25,85.76 ; C7.2 21.74,88.23 ; 25.09,81.07 C8.2 25.88,81.07 ; 25.33,61.4 C9.2 25.33,62.23 ; U6.9 v1(115.23,74.27) ; 97.18,92.94 R40.2 99.67,92.94 ; 112.09,82.03 C17.2 ; C17.2 113.65,82.03 ; C17.2 112.09,79.9 ; 49.84,93.76 LED10.C 49.84,95.47 ; 112.08,79.26 C18.2 112.08,77.59 ; 16.51,79.81 C11.2 16.51,81.48 ; TV2.A 16.15,44.5 ; TV2.A 16.69,44.5 ; TV2.A 15.93,44.36 v1(15.93,45.16) ; TV4.A 16.69,39.73 ; TV4.A 16.69,39.01 ; TV4.A v1(17.22,39.37) ; C6.1 42.42,34.09 v2(41.59,34.92) ; C6.1 41.91,34.49 ; C6.1 41.91,33.66 ; TV1.A 16.69,46.85 ; TV1.A 16.69,46.31 ; TV1.A v1(16.94,46.67) ; J8.10 9.63,24.24 ; J8.10 8.15,24.24 ; J8.10 8.15,22.75 ; J8.10 9.63,22.75 ; 8.15,31.86 J8.4 9.63,31.86 ; 17.98,78.94 C12.2 17.47,78.94 ; 112.08,76.72 C19.2 112.59,76.72 ; 9.63,25.29 J8.8 8.15,25.29 ; 69.75,96.65 J3.5 69.75,98.35 ; 42.98,50.48 C4.1 44.65,50.48 ; 95.22,92.94 R39.2 92.74,92.94 ; 91.42,57.35 R48.2 91.42,55.68 ; 42.52,53.57 R36.2 40.03,53.57 ; C14.2 33.46,63.06 ; C14.2 v1(34.22,62.23) ; C14.2 33.97,63.06 ; 106.46,85.76 C16.2 ; C16.2 110.98,85.76 ; C16.2 106.46,88.23 ; C16.2 110.98,88.23 ; U5.9 v1(22.57,64.77) ; 33.63,53.57 R34.2 31.14,53.57 ; 76.18,63.94 R56.2 76.18,65.6 ; U4.10 48.09,27.29 ; U4.10 48.09,26.9 ; U4.10 v1(47.25,26.04) ; 34.09,75.76 C15.2 34.6,75.76 ; C23.2 v1(106.68,74.93) ; 53.91,67.75 C13.2 ; C13.2 54.92,69.41 ; C13.2 53.91,69.41 ; C13.2 54.92,67.75 ; U1.7 19.34,42.2 v2(17.78,40.64) ; U1.7 21.15,41.79 ; U1.7 18.87,41.79 ; 16.99,67.83 U5.1 ; U5.1 17.36,67.83 ; 33.05,92.94 R24.2 35.53,92.94 ; 26.64,92.94 R22.2 24.16,92.94 ; 16.15,41.55 TV3.A ; TV3.A 16.69,41.55 ; TV3.A v1(17.27,41.91) ; 91.12,51.24 C22.2 91.12,52.9 ; 7.2,45.97 J1.6 6.97,45.23 ; 113.06,53.57 R54.2 115.54,53.57 ; 62.99,101.31 J3.9 ; J3.9 62.99,99.05 ; J3.9 64.95,99.05 ; J3.9 64.95,101.31 ; J1.10 6.97,41.64 ; J1.10 5.48,41.64 ; J1.10 5.48,40.15 ; J1.10 6.97,40.15 ; J3.6 72.4,96.65 ; J3.6 72.4,99.01 ; J3.6 69.94,99.01 ; J3.6 69.94,96.65 ; TV5.A 16.69,36.47 ; TV5.A 16.69,37.19 ; TV5.A 16.36,36.63 v1(17.27,36.63) ; 23.5,53.57 R32.2 24.74,53.57 ; 111.1,53.57 R53.2 108.61,53.57 ; 76.72,72.71 C25.1 75.05,72.71 ; U6.1 v1(121.39,72.78) ; U4.20 54.09,33.14 v2(54.93,33.97) ; 39.98,92.94 R25.2 37.49,92.94 ; 117.5,53.57 R55.2 118.75,53.57 ; 66.02,63.94 R37.2 66.02,65.6
  TOP w1.016: C10.2 v2(19.88,60.76)
  TOP w1.27: U2.3 v2(72.39,80.01)
  BOTTOM w0.508: 76.04,98.78 TP24.1 ; TP24.1 78.54,98.78 ; TP24.1 78.54,96.27 ; TP24.1 76.04,96.27
  vias: v1(13.34,83.82) v1(14.29,92.71) v1(16.51,53.66) v1(25.4,89.85) v1(25.4,84.14) v1(25.72,60.64) v1(25.78,69.98) v1(25.91,81.79) v1(27.24,60.64) v1(29.21,38.73) v1(35.37,75.12) v1(40.96,92.71) v1(43.5,53.66) v1(45.09,46.67) v1(46.99,46.67) v1(46.99,37.15) v1(52.07,47.62) v1(53.34,34.35) v1(54.93,44.77) v1(60.64,96.2) v1(61.59,28.26) v1(61.59,2.54) v1(62.55,79.06) v1(66.67,86.36) v1(66.67,84.45) v1(66.67,82.55) v1(67.94,90.17) v1(69.85,90.17) v1(71.12,93.98) v1(71.75,90.17) v1(72.39,71.75) v1(73.66,90.17) v1(73.98,71.75) v1(74.61,98.42) v1(74.61,96.52) v1(75.88,99.69) v1(75.88,95.25) v1(75.88,71.75) v1(78.11,86.36) v1(78.11,84.45) v1(78.11,82.55) v1(78.74,95.25) v1(79.06,99.69) v1(80.01,98.42) v1(80.01,96.52) v1(93.98,53.98) v1(96.2,93.03) v1(105.41,87) v1(109.54,53.02) v1(118.11,93.03) v1(120.65,61.91) v1(124.78,58.74) v1(124.78,56.83) v1(124.78,54.93) v1(126.36,34.61) v1(126.36,2.54) v1(128.91,21.59) v1(128.91,18.41) v1(130.18,22.86) v1(130.18,17.78) v1(132.72,22.86) v1(132.72,17.78) v1(133.99,21.59) v1(133.99,18.41) v2(68.64,87) v2(68.64,86.36) v2(68.64,85.72) v2(68.64,85.09) v2(68.64,84.45) v2(68.64,83.82) v2(68.64,83.19) v2(68.64,82.55) v2(68.64,81.92) v2(68.64,81.28) v2(69.27,87) v2(69.27,86.36) v2(69.27,85.72) v2(69.27,85.09) v2(69.27,84.45) v2(69.27,83.82) v2(69.27,83.19) v2(69.27,82.55) v2(69.27,81.92) v2(69.27,81.28) v2(69.91,87) v2(69.91,86.36) v2(69.91,85.72) v2(69.91,85.09) v2(69.91,84.45) v2(69.91,83.82) v2(69.91,83.19) v2(69.91,82.55) v2(69.91,81.92) v2(69.91,81.28) v2(70.54,87) v2(70.54,86.36) v2(70.54,85.72) v2(70.54,85.09) v2(70.54,84.45) v2(70.54,83.82) v2(70.54,83.19) v2(70.54,82.55) v2(70.54,81.92) v2(70.54,81.28) v2(71.18,87) v2(71.18,86.36) v2(71.18,85.72) v2(71.18,85.09) v2(71.18,84.45) v2(71.18,83.82) v2(71.18,83.19) v2(71.18,82.55) v2(71.18,81.92) v2(71.18,81.28) v2(71.81,87) v2(71.81,86.36) v2(71.81,85.72) v2(71.81,85.09) v2(71.81,84.45) v2(71.81,83.82) v2(71.81,83.19) v2(71.81,82.55) v2(71.81,81.92) v2(71.81,81.28) v2(72.45,87) v2(72.45,86.36) v2(72.45,85.72) v2(72.45,85.09) v2(72.45,84.45) v2(72.45,83.82) v2(72.45,83.19) v2(72.45,82.55) v2(72.45,81.92) v2(72.45,81.28) v2(73.08,87) v2(73.08,86.36) v2(73.08,85.72) v2(73.08,85.09) v2(73.08,84.45) v2(73.08,83.82) v2(73.08,83.19) v2(73.08,82.55) v2(73.08,81.92) v2(73.08,81.28) v2(73.72,87) v2(73.72,86.36) v2(73.72,85.72) v2(73.72,85.09) v2(73.72,84.45) v2(73.72,83.82) v2(73.72,83.19) v2(73.72,82.55) v2(73.72,81.92) v2(73.72,81.28) v2(74.35,87) v2(74.35,86.36) v2(74.35,85.72) v2(74.35,85.09) v2(74.35,84.45) v2(74.35,83.82) v2(74.35,83.19) v2(74.35,82.55) v2(74.35,81.92) v2(74.35,81.28) v2(74.99,87) v2(74.99,86.36) v2(74.99,85.72) v2(74.99,85.09) v2(74.99,84.45) v2(74.99,83.82) v2(74.99,83.19) v2(74.99,82.55) v2(74.99,81.92) v2(74.99,81.28) v2(75.62,87) v2(75.62,86.36) v2(75.62,85.72) v2(75.62,85.09) v2(75.62,84.45) v2(75.62,83.82) v2(75.62,83.19) v2(75.62,82.55) v2(75.62,81.92) v2(75.62,81.28) v2(76.26,87) v2(76.26,86.36) v2(76.26,85.72) v2(76.26,85.09) v2(76.26,84.45) v2(76.26,83.82) v2(76.26,83.19) v2(76.26,82.55) v2(76.26,81.92) v2(76.26,81.28)
VBUS: length 4.9
  TOP w0.635: D1.A 66.95,93.67 66.77,93.85 J3.1
VCC_C: length 71.4
  TOP w0.508: 22.03,63.7 21.26,64.46 U5.7
  TOP w0.635: 21.26,76.83 U5.22
  TOP w1.016: 22.03,63.7 C10.1 C9.1 23.69,61.79 v1(22.23,60.33)
  TOP w1.27: 21.26,76.83 21.26,76.97 C12.1 19.17,79.06 C11.1 20.95,80.64 v1(21.36,80.24) 21.59,80.01 C8.1
  TOP w1.905: C7.1 23.02,80.62 C8.1
  TOP w2.54: C7.1 16.64,87.5 v1(14.92,89.22)
  BOTTOM w1.016: v1(22.23,60.33) 21.36,61.19 v1(21.36,80.24)
  BOTTOM w2.54: v1(14.92,89.22) 5.4,89.22 TP22.1 5.08,83.19 J2.1
VCC_P: length 69.8
  TOP w0.254: 116.96,61.03 C20.1 ; 116.07,80.96 C17.1
  TOP w0.508: v1(116.41,75.73) 116.53,75.61 U6.7 ; 116.96,61.03 C21.1 116.96,64.65 116.53,65.08 U6.22
  TOP w1.27: v1(116.41,75.73) 114.89,75.73 C19.1 C18.1 v1(115.78,79.46) 116.07,79.75 116.07,80.96 ; v1(115.89,60.96) C20.1
  TOP w1.905: 116.07,80.96 C16.1 v1(122.24,87)
  BOTTOM w1.27: v1(115.78,79.46) 112.65,76.33 112.65,68.13 114.68,66.1 arc(114.81,66.05) 114.95,66 114.99,65.99 arc(115.08,65.97) 115.17,65.96 116.06,65.96 117.22,64.81 117.22,62.29 v1(115.89,60.96)
  BOTTOM w2.54: v1(122.24,87) 129.54,87 TP23.1 130.81,88.27 J7.1
BUFFER_OE: length 61.8
  TOP w0.254: v1(58.42,40.32) 58.42,34.92 55.33,31.84 U4.18 52.3,31.84 47.94,36.2 29.48,36.2 25.63,40.04 25.63,45.46 ; 25.63,45.46 24.98,46.11 U1.1 ; 25.63,45.46 U1.19 ; v1(55,41.91) 54.25,41.16 R18.2
  BOTTOM w0.254: v1(55,41.91) 56.83,41.91 v1(58.42,40.32)
CLK: length 61.4
  TOP w0.254: 29.21,77.54 29.21,77.24 27.49,75.51 26.94,75.51 25.82,74.39 U5.15 ; 29.21,77.54 TP6.1 ; 29.21,77.54 v1(30.61,77.54) ; v1(30.18,47.73) 30.18,47.73 31.5,47.73 31.54,47.7 U3.3 ; U1.14 29.84,42.2 30.53,42.9 30.53,43.85 v1(30.05,44.33)
  BOTTOM w0.254: v1(30.05,44.33) 30.18,44.46 30.18,47.72 v1(30.18,47.73) 30.61,48.16 v1(30.61,77.54)
CLK_E: length 59.3
  TOP w0.254: U1.6 17.84,42.85 v1(17.78,42.79) ; TV6.C 14.23,34.29 ; 14.23,34.29 14.23,31.49 v1(16.38,29.34) 35.69,29.34 TP5.1 ; 14.23,34.29 13.17,35.34 9.23,35.34 J1.9
  BOTTOM w0.254: v1(17.78,42.79) 17,42.79 16.38,42.17 v1(16.38,29.34)
CW_CCW: length 61.7
  TOP w0.254: TP7.1 v1(31.74,89.53) ; U5.16 25.17,72.14 25.51,71.8 26.12,71.8 27.03,72.71 v1(31.74,72.71) ; v1(29.84,43.18) 29.41,42.75 28.31,42.75 28.2,42.85 U1.15 ; U3.4 v1(31.22,47.05)
  BOTTOM w0.254: v1(29.84,43.18) 30.4,43.18 30.75,43.53 30.75,46.58 v1(31.22,47.05) 31.22,72.18 v1(31.74,72.71) v1(31.74,89.53)
CW_CCW_E: length 50.6
  TOP w0.254: 14.79,37.4 14.79,37 TV5.C ; 14.79,37.4 15.18,37.78 17.09,37.78 18.01,36.86 18.01,31.73 19.89,29.84 31.75,29.84 TP4.1 ; 14.79,37.4 13.62,38.57 13.62,43.51 ; 13.62,43.51 15.88,43.51 15.91,43.48 18.41,43.48 18.44,43.51 U1.5 ; 13.62,43.51 7.91,43.51 6.8,44.62 4.86,44.62 J1.7
D+: length 0.6
  TOP w0.254: J3.3 J3.2
ENABLE: length 86.1
  TOP w0.254: U3.10 37.17,45.1 34.39,47.88 34.39,49.45 31.78,52.07 v1(27.3,52.07) ; TP10.1 36.2,89.15 34.42,90.93 28.57,90.93 26.91,89.27 v1(26.91,76.83) 26.7,77.04 24.02,77.04 22.57,75.59 U5.20 ; U1.18 v1(28.71,44.81)
  BOTTOM w0.254: v1(28.71,44.81) 27.94,45.57 27.94,51.44 v1(27.3,52.07) 28.26,53.02 28.26,75.49 v1(26.91,76.83)
ENABLE_E: length 45
  TOP w0.254: v1(18.44,45.62) 18.6,45.46 U1.2 ; TV2.C 9.21,44.13 v1(8.89,44.45) ; TP1.1 v1(20.32,34.61)
  BOTTOM w0.254: J1.1 4.86,49.87 4.86,48.09 5.63,47.33 8.89,47.33 ; 8.89,47.33 9.27,47.33 10.83,48.9 15.69,48.9 18.44,46.14 v1(18.44,45.62) 20.32,43.74 v1(20.32,34.61) ; 8.89,47.33 v1(8.89,44.45)
EXT_+3.3V_C: length 93.9
  TOP w0.508: TV1.C 12.05,46.67 10.16,48.56 TP20.1 ; v1(24.01,65.2) 32.03,65.2 32.38,65.56 32.38,67.35 33.11,68.07 46.64,68.07 48.58,70.02 48.58,86.05 J4.2
  TOP w1.27: J1.2 7.87,52.7 TP20.1
  BOTTOM w1.27: TP20.1 10.79,52.07 22.72,52.07 24.01,53.36 v1(24.01,65.2)
EXT_+3.3V_P: length 92.2
  TOP w1.27: J6.2 132.33,52.06 131.44,52.95 ; TP21.1 127.65,52.95 131.44,52.95 ; 131.44,52.95 131.44,53.47 133.78,55.8 133.78,89.87 132.41,91.24 91.64,91.24 J5.2
I01: length 46.5
  TOP w0.254: U6.16 112.63,65.69 v1(111.32,64.38) ; J6.3 114.76,48.51 v1(110.62,44.37) 110.06,43.81 TP27.1
  BOTTOM w0.254: v1(111.32,64.38) 110.62,63.68 v1(110.62,44.37)
I02: length 49.6
  TOP w0.254: TP30.1 110.24,40.39 v1(112.17,40.39) 129.29,40.39 J6.9 ; U6.19 v1(114.58,64.45)
  BOTTOM w0.254: v1(114.58,64.45) 113.35,63.22 113.35,41.57 v1(112.17,40.39)
I11: length 41.6
  TOP w0.254: v1(112.39,44.13) 113.98,44.13 TP28.1 116.46,45.97 J6.5 ; U6.17 113.28,65.32 v1(112.85,64.89)
  BOTTOM w0.254: v1(112.85,64.89) 112.39,64.43 v1(112.39,44.13)
I12: length 48.4
  TOP w0.254: TP31.1 v1(116.84,38.73) 130.18,38.73 J6.10 ; U6.20 115.23,65.11 v1(115.57,64.77)
  BOTTOM w0.254: v1(116.84,38.73) 114.87,40.7 114.87,61.38 115.57,62.08 v1(115.57,64.77)
LED_CLK: length 44.3
  TOP w0.254: U3.15 39.26,48.35 39.4,48.49 39.53,48.49 39.94,48.9 52.7,48.9 56.2,45.4 56.2,33.66 55.03,32.49 U4.19
  TOP w0.508: 56.2,42.98 51.13,42.98 49.43,41.27 R60.2
LED_LATCH: length 35.1
  TOP w0.254: v1(48.9,45.97) 48.64,45.72 42.92,45.72 42.24,46.4 U3.12 ; v1(55.24,27.94) U4.12
  TOP w1.27: R61.2 v1(48.86,43.5)
  BOTTOM w0.254: 48.9,43.5 48.9,34.29 v1(55.24,27.94) ; 48.9,43.5 v1(48.86,43.5) ; 48.9,43.5 v1(48.9,45.97)
LED_SERIN: length 23.1
  TOP w0.254: U3.11 39.98,45.75 v1(40.64,45.09) ; v1(40.55,32.49) U4.2
  TOP w1.27: R59.2 v1(40.5,39.05)
  BOTTOM w0.254: v1(40.5,39.05) 40.55,39.05 ; 40.55,39.05 v1(40.55,32.49) ; 40.55,39.05 40.55,44.99 v1(40.64,45.09)
MODE_0: length 69.7
  TOP w0.254: v1(27.06,46.92) 30.38,46.92 30.93,46.36 31.5,46.36 31.54,46.4 U3.5 ; TP8.1 38.1,79.27 35.31,76.47 29.17,76.47 v1(26.99,74.3) ; v1(28.77,43.43) 28.7,43.51 U1.16 ; v1(25.63,75.85) 24.73,75.85 23.87,74.98 U5.18
  BOTTOM w0.254: v1(28.77,43.43) 27.06,45.15 v1(27.06,46.92) 26.47,47.51 26.47,68.04 26.99,68.56 v1(26.99,74.3) 26.99,74.5 v1(25.63,75.85)
MODE_0_E: length 54.3
  TOP w0.254: TP3.1 27.81,30.35 24.07,30.35 22.3,32.13 22.3,38.29 ; TV4.C 16.04,38.29 22.3,38.29 ; 22.3,38.29 22.3,43.14 21.28,44.16 U1.4 18.07,44.16 v1(18.07,44.16)
  BOTTOM w0.254: v1(18.07,44.16) 13.92,48.31 12.42,48.31 10.16,46.06 10.16,43.62 8.79,42.25 5.63,42.25 4.86,43.01 4.86,44.79 J1.5
MODE_1: length 58.7
  TOP w0.254: U5.19 23.22,75.29 24.47,76.54 25.92,76.54 26.43,76.02 27.28,76.02 28.26,77 v1(28.26,78.42) ; TP9.1 30.48,83.19 v1(30.48,82.55) ; U3.6 v1(29.49,45.75) 29.39,45.65 29.39,44.52 28.99,44.12 28.42,44.12 28.39,44.16 U1.17
  BOTTOM w0.254: 29.49,77.47 29.49,67.27 29.18,66.96 29.18,66.39 29.49,66.09 29.49,45.75 v1(29.49,45.75) ; 29.49,77.47 29.21,77.47 v1(28.26,78.42) ; 29.49,77.47 29.49,81.56 v1(30.48,82.55)
MODE_1_E: length 41.1
  TOP w0.254: TV3.C 14.61,41.55 v1(14.61,40.64) ; J1.3 5.02,47.18 8.71,47.18 10.44,45.46 v1(14.1,45.46) 14.49,45.85 16.21,45.85 17.21,44.85 18.35,44.85 18.39,44.81 U1.3 22.48,44.81 24.77,42.52 TP2.1
  BOTTOM w0.254: v1(14.61,40.64) 14.1,41.15 v1(14.1,45.46)
Net_20:
  vias: v2(19.05,71.12) v2(19.05,70.48) v2(19.05,69.85) v2(19.05,69.22) v2(19.05,68.58) v2(19.68,71.12) v2(19.68,70.48) v2(19.68,69.85) v2(19.68,69.22) v2(19.68,68.58) v2(20.32,71.12) v2(20.32,70.48) v2(20.32,69.85) v2(20.32,69.22) v2(20.32,68.58) v2(20.95,71.12) v2(20.95,70.48) v2(20.95,69.85) v2(20.95,69.22) v2(20.95,68.58) v2(21.59,71.12) v2(21.59,70.48) v2(21.59,69.85) v2(21.59,69.22) v2(21.59,68.58) v2(22.23,71.12) v2(22.23,70.48) v2(22.23,69.85) v2(22.23,69.22) v2(22.23,68.58) v2(22.86,71.12) v2(22.86,70.48) v2(22.86,69.85) v2(22.86,69.22) v2(22.86,68.58) v2(23.5,71.12) v2(23.5,70.48) v2(23.5,69.85) v2(23.5,69.22) v2(23.5,68.58) v2(24.13,71.12) v2(24.13,70.48) v2(24.13,69.85) v2(24.13,69.22) v2(24.13,68.58)
Net_121:
  vias: v2(113.67,71.12) v2(113.67,70.48) v2(113.67,69.85) v2(113.67,69.22) v2(113.67,68.58) v2(114.3,71.12) v2(114.3,70.48) v2(114.3,69.85) v2(114.3,69.22) v2(114.3,68.58) v2(114.94,71.12) v2(114.94,70.48) v2(114.94,69.85) v2(114.94,69.22) v2(114.94,68.58) v2(115.57,71.12) v2(115.57,70.48) v2(115.57,69.85) v2(115.57,69.22) v2(115.57,68.58) v2(116.2,71.12) v2(116.2,70.48) v2(116.2,69.85) v2(116.2,69.22) v2(116.2,68.58) v2(116.84,71.12) v2(116.84,70.48) v2(116.84,69.85) v2(116.84,69.22) v2(116.84,68.58) v2(117.47,71.12) v2(117.47,70.48) v2(117.47,69.85) v2(117.47,69.22) v2(117.47,68.58) v2(118.11,71.12) v2(118.11,70.48) v2(118.11,69.85) v2(118.11,69.22) v2(118.11,68.58) v2(118.75,71.12) v2(118.75,70.48) v2(118.75,69.85) v2(118.75,69.22) v2(118.75,68.58)
OUT1A_C: length 24.3
  TOP w0.508: U5.5 v1(19.96,65.01)
  TOP w2.54: TP11.1 12.39,62.55 J2.5
  BOTTOM w1.27: J2.5 8.17,65.01 v1(19.96,65.01)
OUT1A_P: length 16.7
  TOP w0.508: U6.5 117.83,74.97 118.37,75.51
  TOP w1.27: 118.37,75.51 120.97,78.11 TP15.1
  TOP w2.54: TP15.1 124.38,77.55 J7.2
OUT1B_C: length 14.9
  TOP w0.381: 17.14,65.15 18.01,66.02 U5.2
  TOP w1.27: 17.14,65.15 15.49,65.15 TP12.1
  TOP w2.54: J2.4 12.31,67.55 TP12.1
OUT1B_P: length 13.2
  TOP w0.508: U6.2 119.78,71.89 120.55,71.12
  TOP w1.27: TP16.1 121.92,71.12 120.55,71.12
  TOP w2.54: J7.3 124.3,72.55 TP16.1
OUT2A_C: length 25.3
  TOP w0.508: v1(19.96,75.88) U5.24
  TOP w2.54: J2.2 12.15,77.55 TP13.1
  BOTTOM w1.27: J2.2 7.38,75.88 v1(19.96,75.88)
OUT2A_P: length 16.3
  TOP w0.508: U6.24 117.83,64.41 118.6,63.65 119.83,63.65 119.98,63.5
  TOP w1.27: 119.98,63.5 123.19,63.5 TP17.1
  TOP w2.54: TP17.1 124.14,62.55 J7.5
OUT2B_C: length 15.1
  TOP w0.406: 18,72.8 18,72.94 arc(17.79,73.99) 17.19,74.89
  TOP w0.457: 17.19,74.89 16.83,75.25
  TOP w0.508: U5.27 18,72.8
  TOP w1.016: 16.83,75.25 14.92,75.25
  TOP w1.27: 14.92,75.25 TP14.1
  TOP w2.54: J2.3 12.23,72.55 TP14.1
OUT2B_P: length 13
  TOP w0.381: 119.8,66.94 119.8,67.83
  TOP w0.508: U6.27 119.8,66.94 ; 119.8,67.83 120.9,68.93
  TOP w1.27: 120.9,68.93 122.84,68.93 TP18.1
  TOP w2.54: J7.4 124.22,67.55 TP18.1
PHASE 1: length 48.8
  TOP w0.254: TP26.1 111.61,52.55 v1(116.36,52.55) ; U6.15 110.25,65.19 110.25,62.62 v1(116.36,56.52)
  BOTTOM w0.254: J6.1 128.3,52.55 v1(116.36,52.55) v1(116.36,56.52)
PHASE 2: length 67.1
  TOP w0.254: J6.7 128.27,41.91 106.05,41.91 TP29.1 ; U6.18 113.93,64.77 113.03,63.87 113.03,60.64 113.79,59.88 122.62,59.88 123.41,59.09 123.41,52.06 v1(123.01,51.66)
  BOTTOM w0.254: v1(123.01,51.66) 123.01,46.94 126.52,43.43 J6.7
REG_+3.3V: length 51.4
  TOP w1.27: C25.2 C2.2 62.63,75.37 55.24,82.75 J4.4 ; C25.2 75.83,75.42 U2.5 ; C25.2 82.05,81.54 TP19.1 87.4,87.63 J5.4
REG_IN: length 61.3
  TOP w1.27: 62.69,92.71 D1.C 64.85,92.71 66.13,91.43 86.35,91.43 J5.1 ; 62.69,92.71 C1.1 64.06,88.9 v1(65.42,88.9) ; 62.69,92.71 62.69,92.94 57.56,92.94 J4.1 ; U2.1 v1(68.95,77.05)
  BOTTOM w1.27: v1(65.42,88.9) 65.42,80.58 v1(68.95,77.05)
TST: length 46.1
  TOP w0.254: v1(12.7,47.62) 12.72,47.6 29.06,47.6 29.87,48.41 30.46,48.41 30.52,48.35 U3.2
  BOTTOM w0.254: v1(12.7,47.62) 12.7,29.84 10.07,27.22 7.53,27.22 J8.7
UE_RST: length 87
  TOP w0.254: S1.2 9.96,14.62 9.96,15.24 ; 9.96,15.24 10.98,16.26 10.98,25.78 9.46,27.3 7.62,27.3 J8.5 2.37,32.55 2.37,52.58 4.91,55.12 11.99,55.12 18.97,48.13 23.56,48.13 26.35,50.93 30.82,50.93 U3.1 ; 9.96,15.24 R5.2
VPP: length 46.6
  TOP w0.508: J8.3 7.62,29.84 11.43,29.84 13.41,27.86 v1(34.29,27.86) ; U3.8 33.02,44.17 C5.2 33.22,41.08 v1(34.29,40.01)
  BOTTOM w0.508: v1(34.29,40.01) v1(34.29,27.86)
N04356: length 76.8
  TOP w0.381: U6.26 119.13,65.76
  TOP w0.508: 119.13,65.76 119.33,65.56 v1(119.89,65.56)
  TOP w0.762: R43.1 R42.1 R41.1 R40.1 R39.1 ; R43.1 TP46.1 ; R43.1 R44.1 v1(116.2,97.16) 119,99.95 121.35,99.95 122.52,98.78 R38.2
  BOTTOM w0.762: v1(116.2,97.16) 119.82,93.54 119.82,65.62 v1(119.89,65.56)
N04438: length 51.4
  TOP w0.254: U6.3 119.13,73.73
  TOP w0.381: v1(122.05,74.61) 120.01,74.61 119.13,73.73
  TOP w0.762: R50.1 R51.1 R52.1 R53.1 R54.1 R55.1 118.9,55.24 v1(120.65,55.24) 120.65,57.36 R46.2
  BOTTOM w0.762: v1(122.05,74.61) 122.63,74.04 122.63,61.67 120.65,59.69 v1(120.65,55.24)
N05207: length 44.9
  TOP w0.254: U6.25 118.48,65.16 v1(119.13,64.52)
  TOP w0.762: R38.1 120.05,96.85 v1(118.75,98.16) 120.39,98.16 TP44.1
  BOTTOM w0.254: v1(119.13,64.52) 119.92,64.52 120.65,65.24 120.65,86.25 120.59,86.31 120.59,96.32 v1(118.75,98.16)
N05211: length 48.4
  TOP w0.254: U6.4 118.48,74.03 120.97,76.52 v1(122.24,76.52)
  TOP w0.762: TP45.1 116.8,49.53 122.51,55.24 v1(122.51,58.74) 122.19,59.05 119.29,59.05 R46.1
  BOTTOM w0.254: v1(122.24,76.52) 124.78,73.98 124.78,61 v1(122.51,58.74)
N07764: length 61.6
  TOP w0.254: U6.10 114.58,73.8 113.47,74.91 108.11,74.91 106.56,76.45 88.77,76.45 82.04,69.72 82.04,57.02 TP42.1 86.36,54.61 ; C22.1 86.36,54.17 86.36,54.61 ; 86.36,54.61 88.27,56.52 R48.1
N07926: length 34
  TOP w0.254: 102.99,74.68 v1(94.61,74.68) ; 102.99,74.68 102.99,74.93 C23.1 ; 102.99,74.68 103.77,73.89 113.03,73.89 113.28,73.64 U6.12
  BOTTOM w0.254: TP43.1 96.52,80.01 POT4.2 v1(94.61,74.68)
N07967: length 40.4
  TOP w0.254: POT3.2 94.61,64.08 ; 94.61,64.08 102.26,64.08 ; 94.61,64.08 93.65,63.12 84.71,63.12 TP41.1 ; U6.13 112.63,71.8 112.05,71.22 103.35,71.22 102.26,70.13 102.26,64.08 ; C24.1 104.34,62.01 102.26,64.08
N07979: length 55.7
  TOP w0.254: TP40.1 88.02,72.78 U6.14
  BOTTOM w0.254: S2.5 80.06,64.19 80.06,64.82 TP40.1
N08045: length 19.8
  TOP w0.254: S2.6 74.43,61.09 74.43,67.48 R45.2
N08052: length 20.9
  TOP w0.254: R56.1 65.02,56.73 65.02,48.64 S2.4
N13007: length 58
  TOP w0.406: 18.66,74.83 U5.26
  TOP w0.457: v1(14.86,77.47) 16.02,77.47 18.66,74.83
  TOP w0.762: R22.1 R23.1 R24.1 R25.1 ; R22.1 25.4,97.79 TP38.1 ; R22.1 R21.1 19.68,95.73 v1(18.1,95.73) 17.78,95.73 R20.1 13.78,94.46 R19.2
  BOTTOM w0.762: v1(18.1,95.73) 18.1,80.71 v1(14.86,77.47)
N13055: length 40.1
  TOP w0.381: U5.3 18.66,65.58
  TOP w0.508: 17.27,63.37 18.64,64.75 18.64,65.56 18.66,65.58
  TOP w0.762: R36.1 R35.1 R34.1 R33.1 R32.1 22.05,55.09 ; 22.05,55.09 22.05,56.9 22.18,57.02 22.18,57.15 ; 22.05,55.09 R31.1 ; 17.27,63.37 17.27,59.44 19.56,57.15 22.18,57.15 ; 22.18,57.15 22.19,57.15 R27.2
N13235: length 33.1
  TOP w0.254: TP36.1 15.2,97.75 R19.1 10.2,95 10.2,84.09 19.31,74.98 U5.25
N13239: length 20.6
  TOP w0.254: v1(19.19,63.67) 19.28,63.75 19.28,65.29 19.31,65.33 U5.4 ; TP37.1 v1(22.23,53.26)
  TOP w0.762: v1(19.31,58.98) 19.87,58.42 R27.1
  BOTTOM w0.254: v1(19.19,63.67) 19.19,59.1 v1(19.31,58.98) 19.31,56.17 v1(22.23,53.26)
N13369: length 52
  TOP w0.254: U3.16 37.41,49 v1(35.61,50.8) ; E1.4 23.5,12.7 R4.2
  BOTTOM w0.254: E1.4 35.56,50.75 v1(35.61,50.8)
N13541: length 57.5
  TOP w0.254: C13.1 52.85,68 53.08,68 ; 53.08,68 53.08,67.18 54.61,65.65 54.61,60.71 53.59,59.69 32.38,59.69 28.63,63.45 24.79,63.45 23.22,65.03 U5.10 ; 53.08,68 53.08,73.66 ; 53.08,73.66 53.34,73.66 TP34.1 ; 53.08,73.66 R29.1
N13553: length 38.2
  TOP w0.254: 33.09,73.89 37.25,73.89 41.47,78.11 POT2.2 ; 33.09,73.89 32.66,73.89 32.66,74.22 C15.1 ; 33.09,73.89 33.09,68.95 32.09,67.94 29.43,67.94 27.3,65.81 24.87,65.81 24.52,66.16 U5.12
  BOTTOM w0.254: TP35.1 POT2.2
N13573: length 39.1
  TOP w0.254: 43.18,61.19 32.45,61.19 31.41,62.23 C14.1 29.21,64.33 v1(25.24,64.33) ; 43.18,61.19 52.3,61.19 TP33.1 ; 43.18,61.19 POT1.2 ; U5.13 25.24,66.99 25.24,67.78 v1(26.04,68.58)
  BOTTOM w0.254: v1(26.04,68.58) 25.24,67.78 v1(25.24,64.33)
N13585: length 46.5
  TOP w0.254: v1(32.38,69.22) 31.75,68.58 27.93,68.58 26.27,66.92 U5.14
  BOTTOM w0.254: S2.2 57.78,50.16 TP32.1 46.35,55.24 v1(32.38,69.22)
N13636: length 56.6
  TOP w0.254: U3.9 38.1,44.45 v1(36.83,43.18) ; R3.2 v1(19.68,17.14)
  BOTTOM w0.254: 31.8,17.14 v1(19.68,17.14) ; 31.8,17.14 31.8,4.5 E1.3 ; 31.8,17.14 36.83,22.18 v1(36.83,43.18)
N13645: length 18.5
  TOP w0.254: R37.1 61.54,63.41 61.54,49.58 S2.3
N18632: length 32.4
  TOP w0.254: v1(31.45,45.03) 31.51,45.1 U3.7 ; E1.6 21.55,24.77 R2.2
  BOTTOM w0.254: E1.6 31.45,30.81 v1(31.45,45.03)
N24750: length 4
  TOP w0.254: LED3.A 56.81,14.22 56.57,13.97 R6.1
N24893: length 4.5
  TOP w0.254: R7.1 57.5,9.14 LED4.A
N25089: length 4.1
  TOP w0.254: LED1.A 56.4,24.06 R9.1
N25117: length 5
  TOP w0.254: LED5.3 59.63,3.63 56.02,3.63 R10.1
N25418: length 2.6
  TOP w0.254: LED6.A 105.8,23.83 105.69,23.72 R14.1
N25588: length 2.6
  TOP w0.254: R15.1 105.69,17.69 105.8,17.8 LED7.A
N25650: length 36.3
  TOP w0.254: v1(57.15,15.56) 57.86,16.26 LED3.C ; U4.3 42.31,31.84 40.32,29.85 40.32,25.4 v1(42.55,23.18)
  BOTTOM w0.254: v1(57.15,15.56) 56.75,15.16 50.56,15.16 v1(42.55,23.18)
N25662: length 40.5
  TOP w0.254: U4.4 45.79,31.19 v1(45.4,30.8) ; LED4.C 57.71,11.18 57.15,11.75 45.72,11.75 v1(44.77,10.79)
  BOTTOM w0.254: v1(44.77,10.79) 41.54,14.02 41.54,26.94 v1(45.4,30.8)
N25674: length 14.3
  TOP w0.254: LED1.C 52.52,26.11 48.09,30.54 U4.5
N25686: length 47.6
  TOP w0.254: v1(58.74,7.3) 58.86,7.3 LED5.4 ; U4.6 42.9,29.89 v1(42.23,29.21)
  BOTTOM w0.254: v1(58.74,7.3) 41.27,7.3 41.03,7.54 41.03,28.02 v1(42.23,29.21)
N25698: length 41.9
  TOP w0.254: U4.7 45.11,29.24 43.81,27.94 43.81,5.71 44.45,5.08 58.3,5.08 LED5.2
N25710: length 20.5
  TOP w0.254: LED2.4 59.18,21.59 49.51,21.59 46.34,24.76 46.34,28.33 46.6,28.59 U4.8
N25722: length 16.2
  TOP w0.254: LED2.2 58.37,19 v1(57.47,18.1) ; v1(57.47,27.94) 56.75,28.65 54.99,28.65 54.92,28.59 U4.13
  BOTTOM w0.254: v1(57.47,27.94) v1(57.47,18.1)
N25734: length 58.7
  TOP w0.254: U4.14 59.03,29.24 v1(59.69,28.57) ; LED6.C 103.75,27.38 99.06,32.07 v1(59.69,32.07)
  BOTTOM w0.254: v1(59.69,32.07) v1(59.69,28.57)
N25746: length 60.7
  TOP w0.254: U4.15 96.16,29.89 98.12,27.93 v1(100.76,27.93) ; v1(100.57,18.73) LED7.C
  BOTTOM w0.254: v1(100.57,18.73) 100.76,18.92 v1(100.76,27.93)
N25832: length 2.6
  TOP w0.254: LED8.A 105.8,11.77 105.69,11.65 R16.1
N25874: length 2.6
  TOP w0.254: R17.1 105.69,5.62 105.8,5.73 LED9.A
N25916: length 67.3
  TOP w0.254: LED8.C v1(100.33,12.7) ; U4.16 96.78,30.54 97.47,29.84 v1(99.38,29.84)
  BOTTOM w0.254: v1(100.33,12.7) 99.38,13.65 v1(99.38,29.84)
N25920: length 73.1
  TOP w0.254: LED9.C v1(100.97,6.67) ; U4.17 97.78,31.19 v1(97.79,31.19)
  BOTTOM w0.254: v1(97.79,31.19) 97.79,9.84 v1(100.97,6.67)
N39738: length 16.6
  TOP w0.254: R26.2 64.39,67.6 64.39,53.59 S2.1
N64475: length 21
  TOP w0.254: v1(51.75,24.77) 48.58,27.94 U4.9 ; R8.2 55.03,35.93 v1(55.14,36.04)
  BOTTOM w0.254: v1(55.14,36.04) 55.93,35.26 55.93,27.65 53.04,24.77 v1(51.75,24.77)
N72290: length 13.7
  TOP w0.254: R47.2 v1(107.95,66.04)
  BOTTOM w0.254: POT3.1 104.14,62.23 v1(107.95,66.04)
N72302: length 11.5
  TOP w0.254: v1(97.79,78.11) 104.74,78.11 R49.2
  BOTTOM w0.254: v1(97.79,78.11) 97.16,77.47 POT4.1
N72314: length 13
  TOP w0.254: v1(36.07,78.82) 35.51,79.38 R30.2
  BOTTOM w0.254: v1(36.07,78.82) 40.55,78.82 43.8,75.56 POT2.1
N72342: length 15.1
  TOP w0.254: R28.2 43.18,66.67 45.72,64.14 POT1.1
N81433: length 39.6
  TOP w0.254: R1.2 36.07,26.04 36.83,25.27 E1.1
N100226: length 5.3
  TOP w0.254: LED2.3 58.54,17.14 R12.1
N100233: length 3.2
  TOP w0.254: R13.1 58.29,20.32 58.34,20.37 LED2.1
N100254: length 3.9
  TOP w0.254: R11.1 57.13,7.62 LED5.1
N158063: length 4.5
  TOP w0.254: R57.2 47.03,91.08 47.24,91.28 LED10.A
N159401: length 6.8
  TOP w0.254: v1(81.92,93.34) 81.92,93.73 LED11.A
  BOTTOM w0.254: v1(81.92,93.34) v1(81.92,89.53) v1(83.22,89.53)

## Copper pours and planes (outline as drawn; the poured copper is in the pictures)
+3.3V_C on PWR: 8.26,1.91 8.26,8.26 1.91,8.26 1.91,93.34 8.26,93.34 8.26,99.69 80.01,99.69 80.01,88.27 81.28,87 84.45,87 85.09,86.36 85.09,76.2 83.82,74.93 70.8,74.93 69.85,73.98 69.85,36.83 71.12,35.56 133.99,35.56 133.99,8.26 127.64,8.26 127.64,1.91
+3.3V_P on PWR: 85.09,73.66 71.75,73.66 71.12,73.03 71.12,38.42 72.71,36.83 133.99,36.83 133.99,93.98 127.64,93.98 127.64,99.69 81.28,99.69 81.28,89.22 82.23,88.27 85.09,88.27 86.36,87 86.36,74.93
GND_SIGNAL on TOP (solid shape): 75.69,82.04 69.22,82.04 69.22,89.15 75.69,89.15
GND_SIGNAL on TOP (solid shape): 119.06,68.26 112.08,68.26 111.76,68.58 111.76,69.53 113.67,71.44 119.06,71.44
GND_SIGNAL on TOP (solid shape): 25.08,71.12 25.08,70.8 26.99,70.8 27.94,71.75 32.07,71.75 32.38,71.44 32.38,70.48 31.11,69.22 25.08,69.22 25.08,68.26 24.77,67.94 16.19,67.94 14.92,69.22 14.92,71.12 15.56,71.75 24.45,71.75
GND_SIGNAL on TOP: 58.1,5.4 58.42,5.4 58.42,8.26 58.74,8.57 60.64,8.57 60.64,12.06 58.74,12.06 58.74,13.65 60.64,13.65 60.64,16.83 58.74,16.83 58.74,21.27 58.1,21.27 58.1,21.59 59.05,21.59 59.05,23.5 60.64,23.5 60.64,26.67 58.74,26.67 58.74,25.72 58.1,25.72 58.1,27.62 53.34,27.62 53.34,25.72 52.39,25.72 52.39,22.54 52.7,22.54 52.7,21.91 53.34,21.91 53.34,21.27 52.7,21.27 52.7,13.65 53.02,13.65 53.02,10.16 52.7,10.16 52.7,12.06 46.35,12.06 46.35,14.29 46.67,14.29 46.67,12.7 52.39,12.7 52.39,14.29 52.07,14.29 52.07,20.95 48.58,20.95 48.58,14.29 48.26,14.29 48.26,23.81 50.16,23.81 51.12,24.77 47.31,24.77 46.35,23.81 46.35,28.57 44.45,28.57 44.45,29.53 41.59,29.53 41.59,35.88 52.32,35.88 52.32,35.05 52.45,34.92 53.47,34.92 53.59,35.05 53.59,35.88 55.88,35.88 55.88,32.07 56.2,31.75 58.74,31.75 59.69,32.7 58.74,32.7 58.74,35.56 59.05,35.88 128.59,35.88 128.59,1.27 58.1,1.27 ; 7 cut-outs
GND_SIGNAL on TOP: 25.08,72.07 25.08,60.01 33.02,60.01 33.02,72.07
GND_SIGNAL on TOP: 1.27,1.27 1.27,32.38 1.91,32.38 1.91,52.7 1.27,53.34 0,53.34 0,78.74 10.48,78.74 10.48,85.41 9.65,85.41 9.65,95.02 9.67,95 11.94,95 11.94,94.49 14.1,94.49 14.14,94.53 14.14,98.17 17.14,98.17 17.14,100.33 59.69,100.33 59.69,101.6 76.2,101.6 76.2,100.33 127.64,100.33 127.64,90.17 119.06,90.17 119.06,91.76 111.44,91.76 111.44,82.23 113.67,82.23 113.67,80.01 113.03,80.01 113.03,74.61 114.3,74.61 114.3,79.06 115.57,79.06 115.57,74.61 119.06,74.61 119.06,75.56 121.89,75.56 121.7,74.7 120.82,74.74 120.39,74.74 120.15,74.49 120.13,74.38 120.22,74.32 121.43,74.32 121.99,74.49 122.47,74.18 122.55,74.14 122.63,74.17 123.8,74.68 124.98,74.2 130.81,74.2 131.56,74.02 132.15,73.52 132.26,73.48 132.33,73.58 132.33,75.56 132.33,61.21 132.72,61.21 132.72,85.09 133.35,85.09 133.35,52.07 134.62,52.07 134.62,50.55 131.13,50.55 131.13,52.39 128.59,52.39 128.59,48.58 119.38,48.58 119.38,49.02 123.8,49.02 123.9,49.08 123.88,49.2 123.41,49.98 123.36,50.9 123.33,50.99 123.23,51.01 122.39,51.38 122.66,52.25 122.68,52.27 122.69,52.3 122.69,54.46 122.65,54.54 122.56,54.55 122.56,59.37 120.02,59.37 120.02,58.42 117.22,58.42 117.22,56.77 120.02,56.77 120.02,52.7 120.69,52.7 119.38,51.39 119.38,52.39 111.12,52.39 111.12,48.58 107.31,48.58 107.31,45.72 101.28,45.72 101.28,37.15 117.16,37.15 117.16,40.01 117.79,40.01 117.79,38.42 128.59,38.42 128.59,39.05 131.13,39.05 131.13,39.37 133.67,39.37 133.67,41.78 134.62,41.78 134.62,1.27 128.27,1.27 128.27,35.56 55.56,35.56 55.56,27.33 55.16,27.26 54.78,27.43 54.44,27.43 54.4,27.41 54.39,27.38 54.39,26.89 54.4,26.86 54.44,26.84 55.56,26.84 55.56,26.35 50.48,26.35 50.48,26.99 51.75,26.99 51.75,27.62 47.94,27.62 47.94,26.99 48.58,26.99 48.58,25.08 46.35,25.08 46.35,32.07 41.91,32.07 41.91,24.77 42.86,24.77 42.86,24.45 41.91,24.45 41.91,21.91 41.27,21.91 41.27,26.99 36.51,26.99 36.51,23.5 35.24,23.5 35.24,26.04 32.07,26.04 32.07,23.5 28.26,23.5 28.26,26.04 25.08,26.04 25.08,23.5 24.45,23.5 24.45,26.35 34.61,26.35 34.92,26.67 34.92,27.3 14.92,27.3 14.92,24.77 19.37,24.77 19.37,22.54 19.68,22.54 19.68,2.54 33.02,2.54 33.02,5.71 36.51,5.71 36.51,1.27 ; 59 cut-outs
